# EAGLE board controller-ha-v1 (EAGLE 6.5.0), part 1 of 2
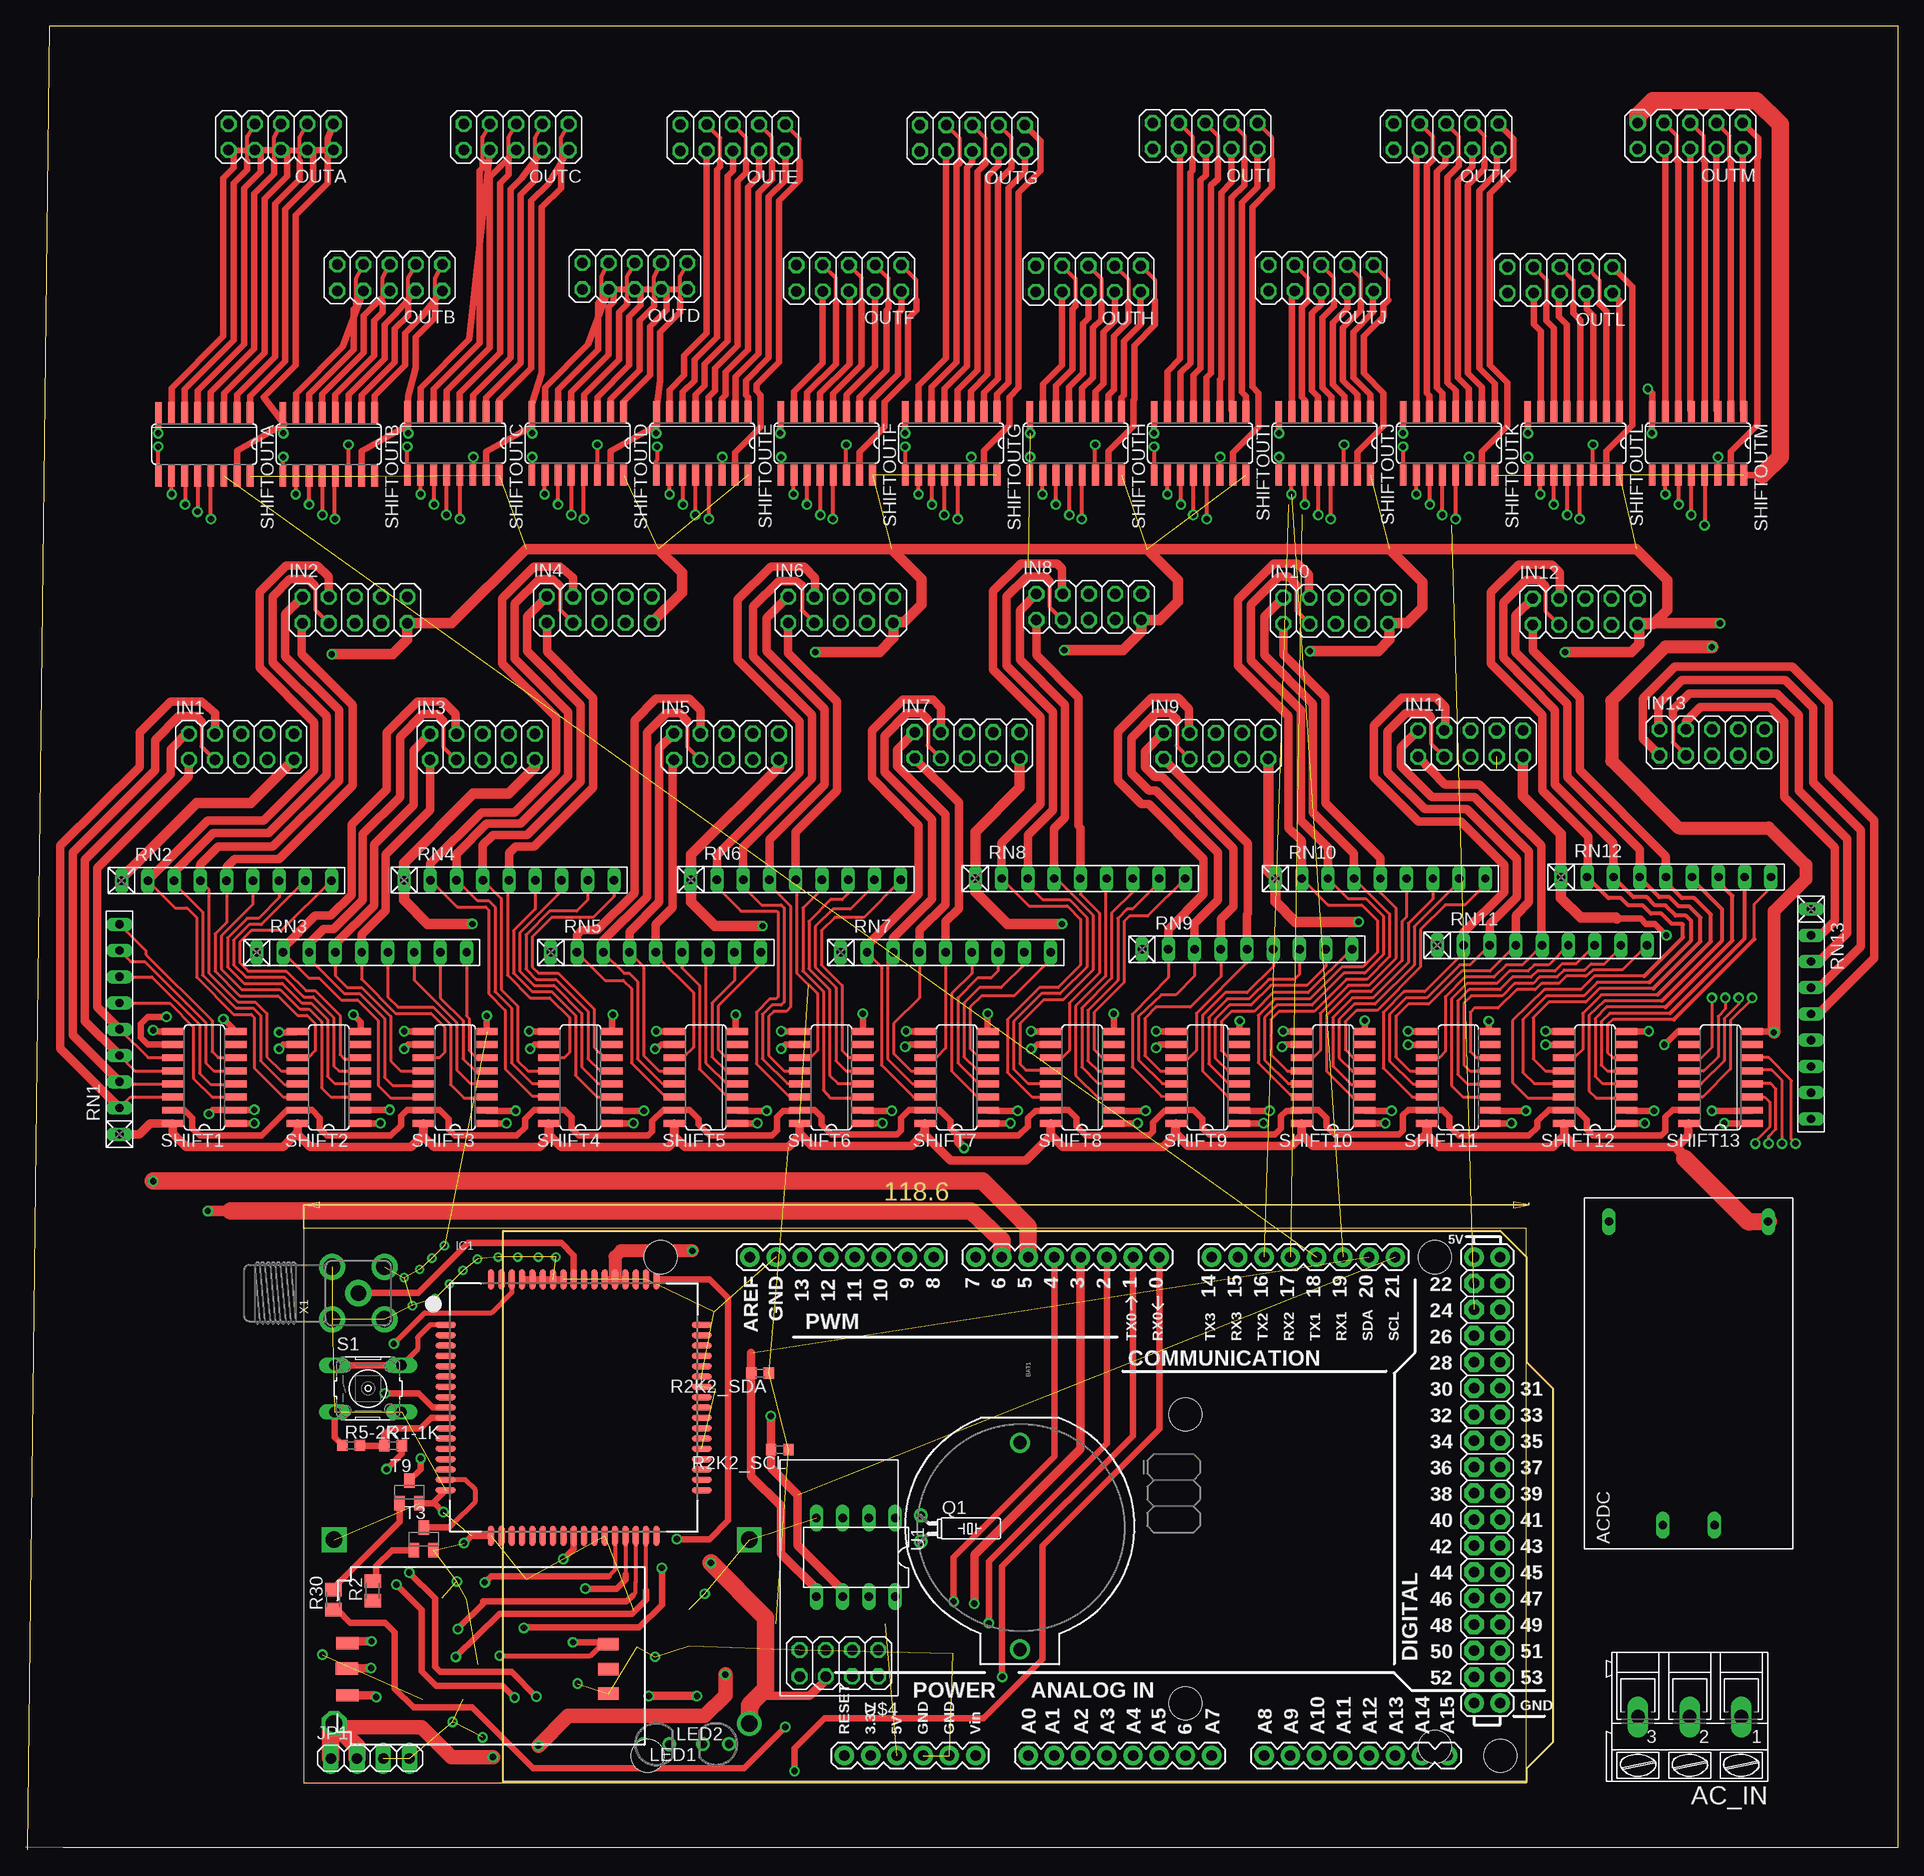
[diagram p0: board, top side]
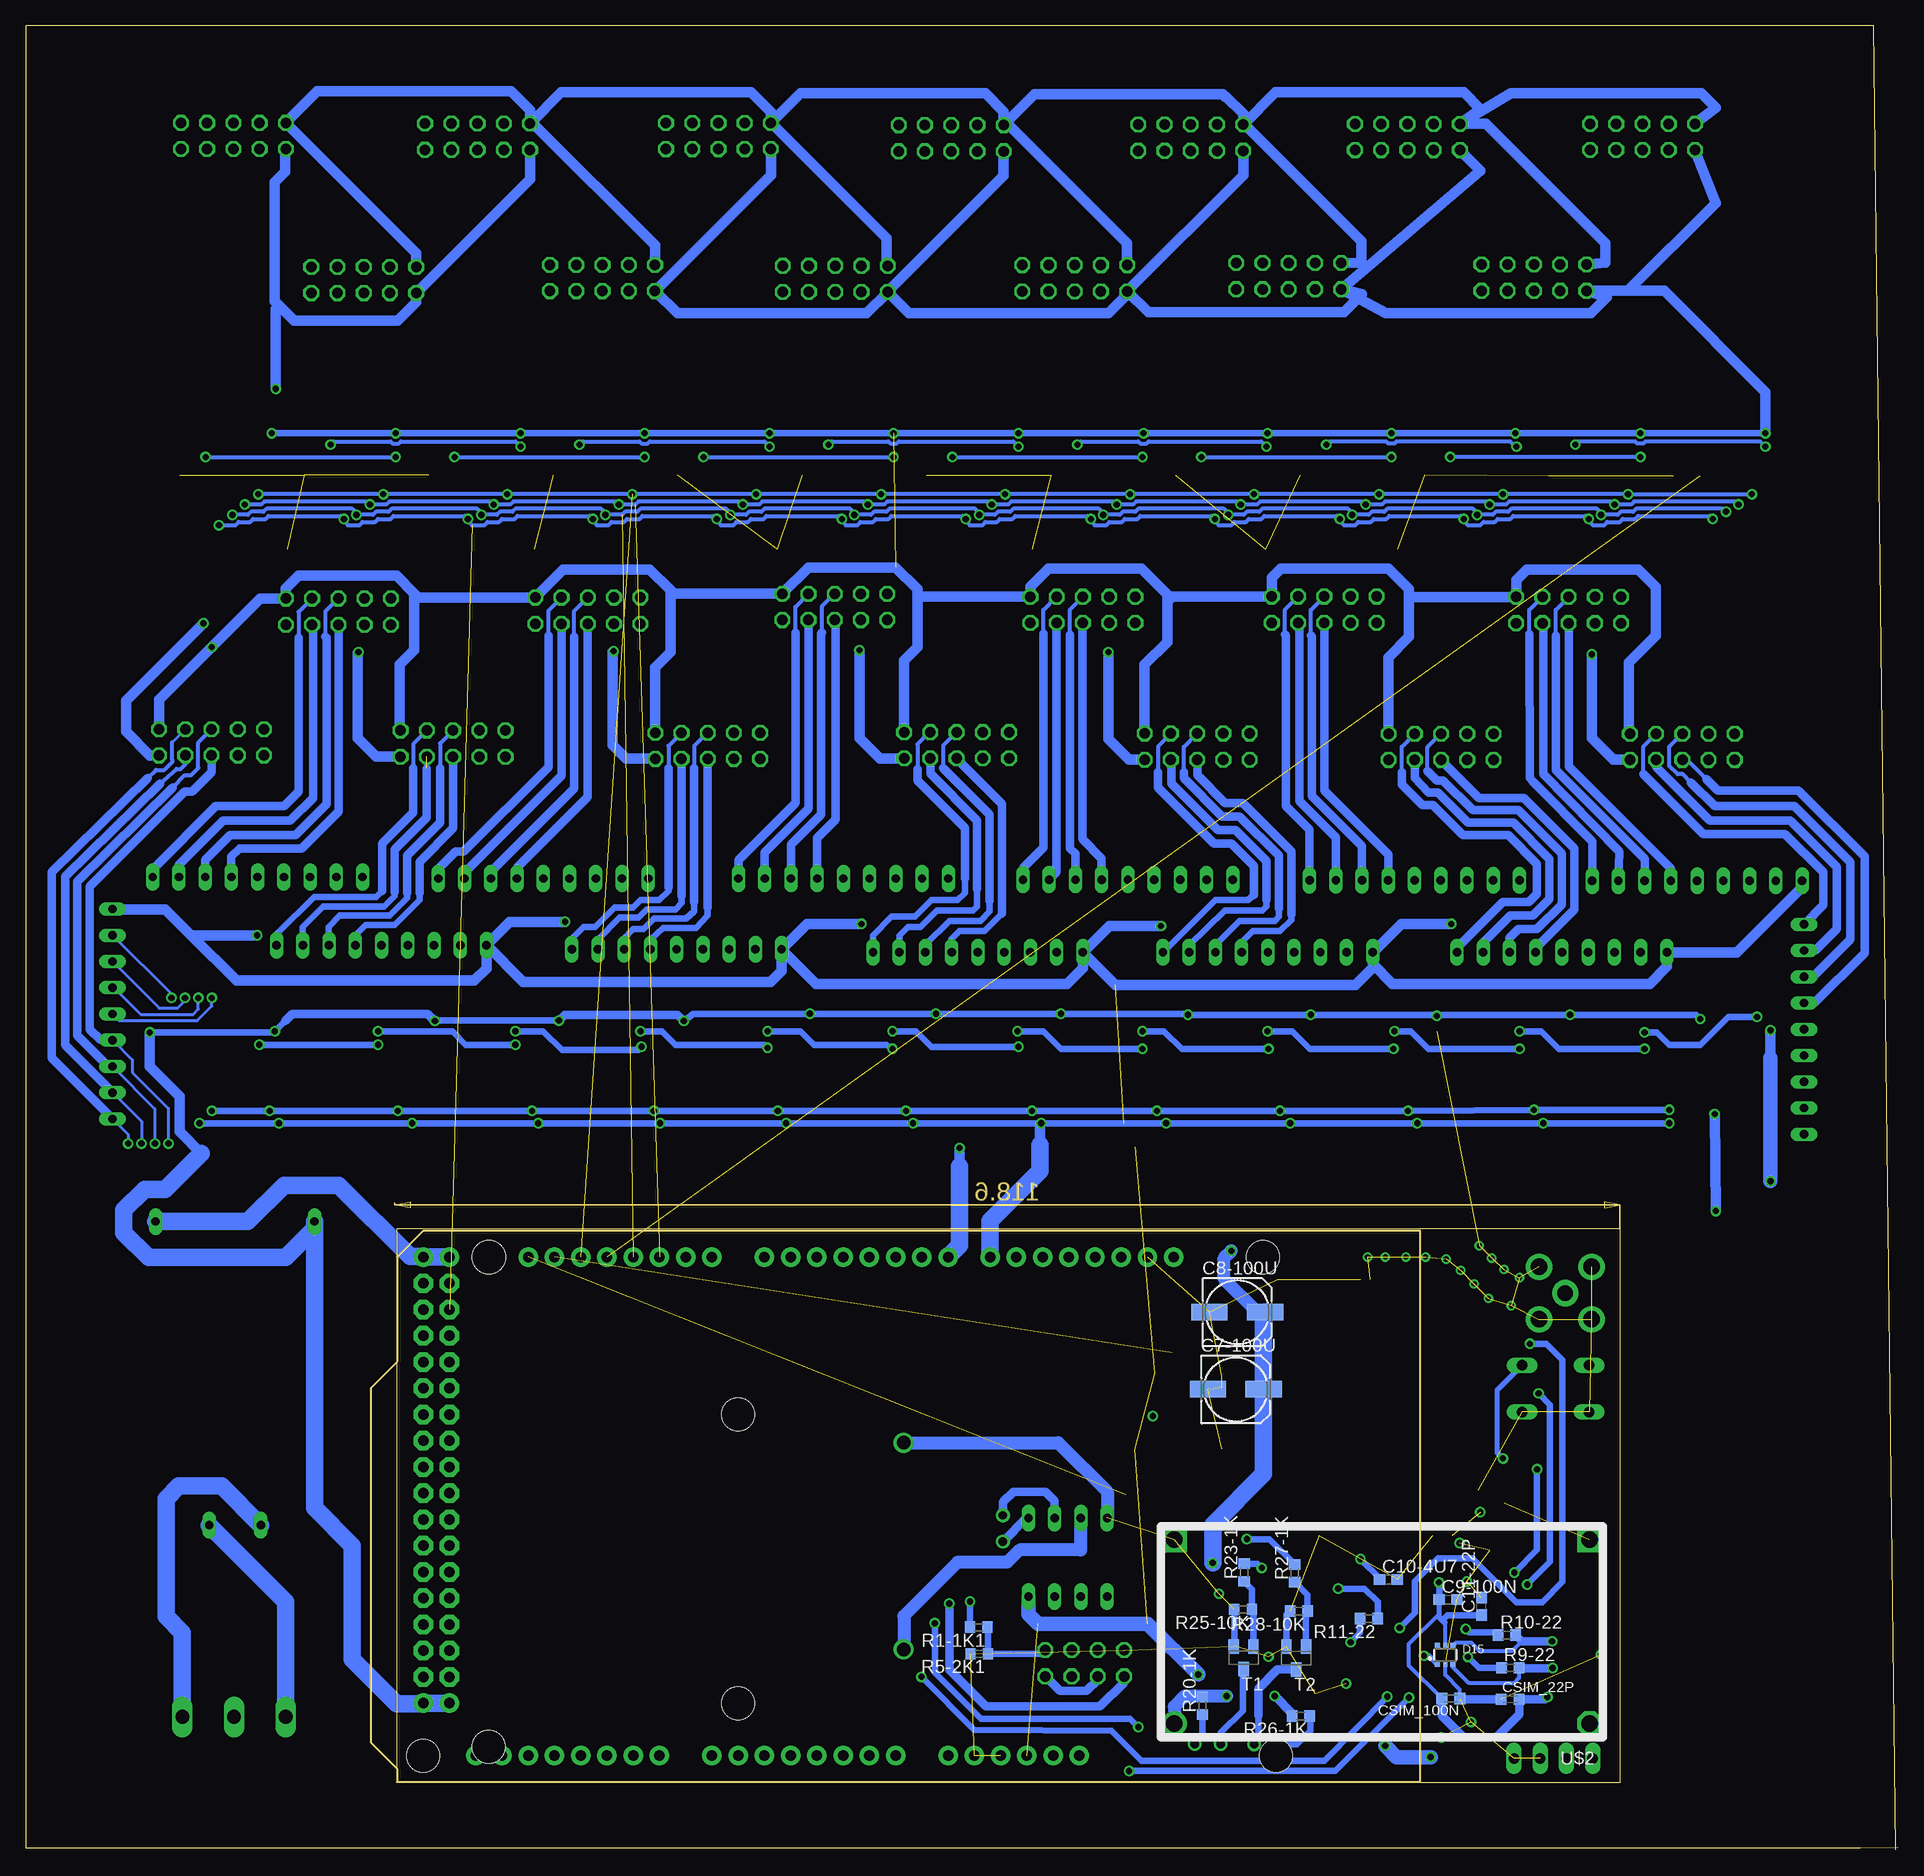
[diagram p1: board, bottom side, seen from below]

Size 181.22 x 176.58 mm. Coordinates in mm from the lower left corner, seen from the top.
Outline: 0.18,0 2.32,176.58 181.22,176.58 181.22,4.48 181.21,4.48 181.21,0.22 3.64,0.22 0,0.23
Outline: 26.92,6.48 145.27,6.49 145.27,60.14 26.92,60.14 26.92,6.48
Copper layers (1*16): Top 0.035mm / dielectric 1.5mm / Bottom 0.035mm
Design rules "default": minimum track width 10mil, minimum drill 24mil, track to track 8mil, track to pad 8mil, pad to pad 8mil, via to via 8mil, smd to smd 8mil, copper to edge 40mil, drill to drill 8mil, minimum pad ring 10mil, minimum via ring 8mil, stop-mask expansion 4mil, vias tented up to drill 0mil, thermal gap 10mil
Net classes: 1 power: width 0.305 mm, drill 0.6 mm, clearance 0.254 mm; 2 gnd: width 0.254 mm, drill 0.6 mm, clearance 0.254 mm
Holes 3.2 mm at 136.42,9.98

## Footprints (pad centres in the part's own frame; a part is rotated, then mirrored left to right if it is on the bottom)
AK3003 = drill 1.321 long: 1 -5.004,0; 2 0,0; 3 5.004,0
HLK-PM01 = drill 0.8 long: AC$1 -14.7,2.5; AC$2 -14.7,-2.5; GND 14.7,7.7; VOUT 14.7,-7.7
BATTCOM_20MM_PTH = drill 1.3: 1 11.85,0; 2 -8.15,0
153CLV-0605 = smd 3.5 x 1.6: + 2.7,0; - -2.7,0
C0603 = smd 1.1 x 1: 1 -0.85,0; 2 0.85,0
C0603K = smd 1.05 x 1.08: 1 -0.875,0; 2 0.875,0
SOT363 = smd 0.5 x 0.5: 1 -0.75,-0.9; 3 0.75,-0.9; 4 0.75,0.9; 6 -0.75,0.9 | smd 0.4 x 0.5: 2 0,-0.9; 5 0,0.9
SIM900_SMT = smd 2 x 0.6: P$1 -12.4,8; P$2 -12.4,7; P$3 -12.4,6; P$4 -12.4,5; P$5 -12.4,4; P$6 -12.4,3; P$7 -12.4,2; P$8 -12.4,1; P$9 -12.4,0; P$10 -12.4,-1; P$11 -12.4,-2; P$12 -12.4,-3; P$13 -12.4,-4; P$14 -12.4,-5; P$15 -12.4,-6; P$16 -12.4,-7; P$17 -12.4,-8; P$35 12.4,-8; P$36 12.4,-7; P$37 12.4,-6; P$38 12.4,-5; P$39 12.4,-4; P$40 12.4,-3; P$41 12.4,-2; P$42 12.4,-1; P$43 12.4,0; P$44 12.4,1; P$45 12.4,2; P$46 12.4,3; P$47 12.4,4; P$48 12.4,5; P$49 12.4,6; P$50 12.4,7; P$51 12.4,8 | smd 0.6 x 2: P$18 -8,-12.4; P$19 -7,-12.4; P$20 -6,-12.4; P$21 -5,-12.4; P$22 -4,-12.4; P$23 -3,-12.4; P$24 -2,-12.4; P$25 -1,-12.4; P$26 0,-12.4; P$27 1,-12.4; P$28 2,-12.4; P$29 3,-12.4; P$30 4,-12.4; P$31 5,-12.4; P$32 6,-12.4; P$33 7,-12.4; P$34 8,-12.4; P$52 8,12.4; P$53 7,12.4; P$54 6,12.4; P$55 5,12.4; P$56 4,12.4; P$57 3,12.4; P$58 2,12.4; P$59 1,12.4; P$60 0,12.4; P$61 -1,12.4; P$62 -2,12.4; P$63 -3,12.4; P$64 -4,12.4; P$65 -5,12.4; P$66 -6,12.4; P$67 -7,12.4; P$68 -8,12.4
2X05 = drill 1.016 octagon: 1 -5.08,-1.27; 2 -5.08,1.27; 3 -2.54,-1.27; 4 -2.54,1.27; 5 0,-1.27; 6 0,1.27; 7 2.54,-1.27; 8 2.54,1.27; 9 5.08,-1.27; 10 5.08,1.27
1X04 = drill 1.016 long: 1 -3.81,0; 2 -1.27,0; 3 1.27,0; 4 3.81,0
LED3MM-NS = drill 0.813: A -1.27,0; K 1.27,0
TC26H = drill 0.813: 1 -1.27,0; 2 1.27,0
R0603 = smd 1 x 1.1: 1 -0.85,0; 2 0.85,0
M0805 = smd 1.3 x 1.6: 1 -0.95,0; 2 0.95,0
RN-9 = drill 0.813 long: 1 -10.16,0; 2 -7.62,0; 3 -5.08,0; 4 -2.54,0; 5 0,0; 6 2.54,0; 7 5.08,0; 8 7.62,0; 9 10.16,0
B3F-10XX = drill 1.016 long: 1 -3.251,2.261; 2 3.251,2.261; 3 -3.251,-2.261; 4 3.251,-2.261
SO16 = smd 0.66 x 2.032: 1 -4.445,-3.073; 2 -3.175,-3.073; 3 -1.905,-3.073; 4 -0.635,-3.073; 5 0.635,-3.073; 6 1.905,-3.073; 7 3.175,-3.073; 8 4.445,-3.073; 9 4.445,3.073; 10 3.175,3.073; 11 1.905,3.073; 12 0.635,3.073; 13 -0.635,3.073; 14 -1.905,3.073; 15 -3.175,3.073; 16 -4.445,3.073
SOT23-BEC = smd 1 x 1.4: B -0.95,-1.1; C 0,1.1; E 0.95,-1.1
DIL08 = drill 0.813 long: 1 -3.81,-3.81; 2 -1.27,-3.81; 3 1.27,-3.81; 4 3.81,-3.81; 5 3.81,3.81; 6 1.27,3.81; 7 -1.27,3.81; 8 -3.81,3.81
ARDUINO_MEGA = drill 1.016 pad 1.88: 0 63.5,50.8; 1 60.96,50.8; 2 58.42,50.8; 3 55.88,50.8; 3.3V 35.56,2.54; 4 53.34,50.8; 5 50.8,50.8; 5V@0 38.1,2.54; 5V@1 93.98,50.8; 5V@2 96.52,50.8; 6 48.26,50.8; 7 45.72,50.8; 8 41.656,50.8; 9 39.116,50.8; 10 36.576,50.8; 11 34.036,50.8; 12 31.496,50.8; 13 28.956,50.8; 14 68.58,50.8; 15 71.12,50.8; 16 73.66,50.8; 17 76.2,50.8; 18 78.74,50.8; 19 81.28,50.8; 20 83.82,50.8; 21 86.36,50.8; A0 50.8,2.54; A1 53.34,2.54; A2 55.88,2.54; A3 58.42,2.54; A4 60.96,2.54; A5 63.5,2.54; A6 66.04,2.54; A7 68.58,2.54; A8 73.66,2.54; A9 76.2,2.54; A10 78.74,2.54; A11 81.28,2.54; A12 83.82,2.54; A13 86.36,2.54; A14 88.9,2.54; A15 91.44,2.54; AREF 23.876,50.8; GND@0 40.64,2.54; GND@1 43.18,2.54; GND@2 93.98,7.62; GND@3 96.52,7.62; GND@4 26.416,50.8; RESET 33.02,2.54; VIN 45.72,2.54 | drill 1.016 pad 1.88 octagon: 22 93.98,48.26; 23 96.52,48.26; 24 93.98,45.72; 25 96.52,45.72; 26 93.98,43.18; 27 96.52,43.18; 28 93.98,40.64; 29 96.52,40.64; 30 93.98,38.1; 31 96.52,38.1; 32 93.98,35.56; 33 96.52,35.56; 34 93.98,33.02; 35 96.52,33.02; 36 93.98,30.48; 37 96.52,30.48; 38 93.98,27.94; 39 96.52,27.94; 40 93.98,25.4; 41 96.52,25.4; 42 93.98,22.86; 43 96.52,22.86; 44 93.98,20.32; 45 96.52,20.32; 46 93.98,17.78; 47 96.52,17.78; 48 93.98,15.24; 49 96.52,15.24; 50 93.98,12.7; 51 96.52,12.7; 52 93.98,10.16; 53 96.52,10.16 | hole 3.2: 15.24,50.8; 13.97,2.54; 66.04,35.56; 66.04,7.62; 90.17,50.8; 96.52,2.54
DCDCMODULE = drill 1.6 square: GND#0 1.7,1.7; GND#1 41.9,1.7 | drill 1.6 octagon: VIN 1.7,19.5 | drill 1.6: VOUT 41.9,19.5
ESP8266 = drill 1.016 octagon: CHPD 1.27,1.27; GND 3.81,-1.27; IO0 -1.27,-1.27; IO2 1.27,-1.27; RST -1.27,1.27; RXD -3.81,-1.27; TXD 3.81,1.27; VCC -3.81,1.27
SIMHOLDER3 = smd 2.2 x 1.2: 1 0.95,4.81; 2 0.91,7.41; 3 0.95,9.86 | smd 2 x 1.2: 4 26.2,9.78; 5 26.22,7.34; 6 26.22,4.98
SMA90_DIP = drill 1.5 pad 2.54: ANTENNA 0,0 | drill 1.6 pad 2.54: GND1 -2.54,2.54; GND2 2.54,2.54; GND3 -2.54,-2.54; GND4 2.54,-2.54

## Placement (x,y rotation side)
AC_IN  AK3003  [AK3003]  161.07,12.88 180 top
ACDC  HLK-PM01  [HLK-PM01]  160.97,46.13 90 top
BAT1  [BATTCOM_20MM_PTH]  96.24,31.26 270 top
C7-100U  [153CLV-0605]  64.09,44.58 0 bottom
C8-100U  [153CLV-0605]  63.95,52.06 0 bottom
C9-100N  [C0603]  43.54,24.23 0 bottom
C10-4U7  [C0603]  49.3,26.18 0 bottom
C11-22P  [C0603]  40.3,23.57 90 bottom
CSIM_22P  [C0603K]  37.53,14.58 0 bottom
CSIM_100N  [C0603K]  43.27,14.65 180 bottom
D15  [SOT363]  43.81,18.87 0 bottom
IC1  [SIM900_SMT]  53.04,42.82 0 top
IN1  [2X05]  20.86,106.78 0 top
IN2  [2X05]  31.86,120.03 0 top
IN3  [2X05]  44.21,106.78 0 top
IN4  [2X05]  55.52,120.06 0 top
IN5  [2X05]  67.83,106.8 0 top
IN6  [2X05]  78.89,120.05 0 top
IN7  [2X05]  91.12,106.93 0 top
IN8  [2X05]  102.91,120.33 0 top
IN9  [2X05]  115.21,106.88 0 top
IN10  [2X05]  126.82,119.96 0 top
IN11  [2X05]  139.86,107.09 0 top
IN12  [2X05]  150.97,119.87 0 top
IN13  [2X05]  163.24,107.21 0 top
JP1  [1X04]  33.34,8.86 0 top
LED1  [LED3MM-NS]  66.81,10.24 180 top
LED2  [LED3MM-NS]  61.04,10.22 0 top
OUTA  [2X05]  24.71,165.83 180 top
OUTB  [2X05]  35.23,152.2 180 top
OUTC  [2X05]  47.47,165.82 180 top
OUTD  [2X05]  58.96,152.35 180 top
OUTE  [2X05]  68.45,165.76 180 top
OUTF  [2X05]  79.68,152.15 180 top
OUTG  [2X05]  91.64,165.7 180 top
OUTH  [2X05]  102.87,152.09 180 top
OUTI  [2X05]  114.17,165.91 180 top
OUTJ  [2X05]  125.39,152.17 180 top
OUTK  [2X05]  137.49,165.85 180 top
OUTL  [2X05]  148.51,151.97 180 top
OUTM  [2X05]  161.13,165.92 180 top
Q1  [TC26H]  86.63,31.11 270 top
R1-1K  [R0603]  35.55,39.12 0 top
R1-1K1  [R0603]  88.97,21.55 180 bottom
R2  R120  [M0805]  33.58,25.08 90 top
R2K2_SCL  [R0603]  72.99,38.75 180 top
R2K2_SDA  [R0603]  71.08,46.15 180 top
R5-2K  [R0603]  31.5,39.16 0 top
R5-2K1  [R0603]  88.92,18.98 0 bottom
R9-22  [R0603]  37.51,17.63 0 bottom
R10-22  [R0603]  37.85,20.78 0 bottom
R11-22  [R0603]  51.2,22.4 180 bottom
R20-1K  [R0603]  67.31,13.94 90 bottom
R23-1K  [R0603]  63.29,26.85 90 bottom
R25-10K  [R0603]  63.38,23.28 180 bottom
R26-1K  [R0603]  57.79,12.97 180 bottom
R27-1K  [R0603]  58.38,26.78 90 bottom
R28-10K  [R0603]  57.98,23.12 180 bottom
R30  R120  [M0805]  29.77,24.23 90 top
RN1  [RN-9]  9.07,79.44 90 top
RN2  [RN-9]  19.43,93.83 0 top
RN3  [RN-9]  32.51,86.88 0 top
RN4  [RN-9]  46.78,93.88 0 top
RN5  [RN-9]  60.98,86.88 0 top
RN6  [RN-9]  74.53,93.93 0 top
RN7  [RN-9]  89.05,86.88 0 top
RN8  [RN-9]  102.08,94.03 0 top
RN9  [RN-9]  118.22,87.18 0 top
RN10  [RN-9]  131.13,94.03 0 top
RN11  [RN-9]  146.79,87.58 0 top
RN12  [RN-9]  158.78,94.18 0 top
RN13  [RN-9]  172.82,80.92 270 top
S1  [B3F-10XX]  33.13,44.66 0 top
SHIFT1  74HC165D  [SO16]  17.28,74.78 90 top
SHIFT2  74HC165D  [SO16]  29.33,74.78 90 top
SHIFT3  74HC165D  [SO16]  41.56,74.78 90 top
SHIFT4  74HC165D  [SO16]  53.7,74.78 90 top
SHIFT5  74HC165D  [SO16]  65.84,74.78 90 top
SHIFT6  74HC165D  [SO16]  77.98,74.78 90 top
SHIFT7  74HC165D  [SO16]  90.12,74.78 90 top
SHIFT8  74HC165D  [SO16]  102.26,74.78 90 top
SHIFT9  74HC165D  [SO16]  114.4,74.78 90 top
SHIFT10  74HC165D  [SO16]  126.54,74.78 90 top
SHIFT11  74HC165D  [SO16]  138.68,74.78 90 top
SHIFT12  74HC165D  [SO16]  151.92,74.78 90 top
SHIFT13  74HC165D  [SO16]  164.06,74.78 90 top
SHIFTOUTA  74HC595D  [SO16]  17.28,136.08 180 top
SHIFTOUTB  74HC595D  [SO16]  29.33,136.08 180 top
SHIFTOUTC  74HC595D  [SO16]  41.38,136.18 180 top
SHIFTOUTD  74HC595D  [SO16]  53.43,136.18 180 top
SHIFTOUTE  74HC595D  [SO16]  65.48,136.18 180 top
SHIFTOUTF  74HC595D  [SO16]  77.53,136.18 180 top
SHIFTOUTG  74HC595D  [SO16]  89.58,136.18 180 top
SHIFTOUTH  74HC595D  [SO16]  101.63,136.18 180 top
SHIFTOUTI  74HC595D  [SO16]  113.68,136.18 180 top
SHIFTOUTJ  74HC595D  [SO16]  125.73,136.18 180 top
SHIFTOUTK  74HC595D  [SO16]  137.78,136.18 180 top
SHIFTOUTL  74HC595D  [SO16]  149.83,136.18 180 top
SHIFTOUTM  74HC595D  [SO16]  161.88,136.18 180 top
T1  [SOT23-BEC]  63.33,18.6 180 bottom
T2  [SOT23-BEC]  58.23,18.56 180 bottom
T3  [SOT23-BEC]  38.52,30.1 0 top
T9  [SOT23-BEC]  37.12,34.65 0 top
U1  DS1307  [DIL08]  80.35,28.32 180 top
U3  ARDUINO-MEGAFULL  [ARDUINO_MEGA]  46.22,6.58 0 top
U$2  DCDCMODULE  [DCDCMODULE]  28.14,31.72 180 bottom
U$4  ESP8266  [ESP8266]  78.72,18.07 180 top
U$5  SIMHOLDER3  [SIMHOLDER3]  30.18,10.15 0 top
X1  [SMA90_DIP]  32.19,53.9 90 top

## Library data of the parts
AC_IN = con-ptr500
ACDC U$2 = bontor
BAT1 = SparkFun-Electromechanical
C7-100U C8-100U C9-100N C10-4U7 C11-22P CSIM_22P CSIM_100N R1-1K R1-1K1 R2K2_SCL R2K2_SDA R5-2K R5-2K1 R9-22 R10-22 R11-22 R20-1K R23-1K R25-10K R26-1K R27-1K R28-10K = rcl
D15 IC1 X1 = microbuilder
IN1-IN13 JP1 OUTA OUTB OUTC OUTD OUTE OUTF OUTG OUTH OUTI OUTJ OUTK OUTL OUTM = pinhead
LED1 LED2 = SparkFun-LED
Q1 = crystal; OC_FARNELL: unknown; OC_NEWARK: unknown
R2 R30 = resistor
RN1-RN13 = resistor-net; OC_FARNELL: unknown; OC_NEWARK: unknown
S1 = switch-omron; MPN: B3F-1000; OC_FARNELL: 176432; OC_NEWARK: 36M3542
SHIFT1-SHIFT13 SHIFTOUTA SHIFTOUTB SHIFTOUTC SHIFTOUTD SHIFTOUTE SHIFTOUTF SHIFTOUTG SHIFTOUTH SHIFTOUTI SHIFTOUTJ SHIFTOUTK SHIFTOUTL SHIFTOUTM = 74xx-eu
T1 T2 = transistor
T3 T9 = transistor-neu-to92
U1 = adafruit
U3 = SparkFun-Boards
U$4 = tigorcustom
U$5 = SparkFun

## Nets
1-1: IN1.1 RN1.5 SHIFT1.11
1-2: IN1.2 RN1.4 SHIFT1.12
1-3: IN1.3 RN1.3 SHIFT1.13
1-4: IN1.4 RN1.2 SHIFT1.14
1-5: IN1.5 RN1.6 SHIFT1.3
1-6: IN1.6 RN1.7 SHIFT1.4
1-7: IN1.7 RN1.8 SHIFT1.5
1-8: IN1.8 RN1.9 SHIFT1.6
2-1: IN2.1 RN2.5 SHIFT2.11
2-2: IN2.2 RN2.4 SHIFT2.12
2-3: IN2.3 RN2.3 SHIFT2.13
2-4: IN2.4 RN2.2 SHIFT2.14
2-5: IN2.5 RN2.6 SHIFT2.3
2-6: IN2.6 RN2.7 SHIFT2.4
2-7: IN2.7 RN2.8 SHIFT2.5
2-8: IN2.8 RN2.9 SHIFT2.6
3-1: IN3.1 RN3.5 SHIFT3.11
3-2: IN3.2 RN3.4 SHIFT3.12
3-3: IN3.3 RN3.3 SHIFT3.13
3-4: IN3.4 RN3.2 SHIFT3.14
3-5: IN3.5 RN3.6 SHIFT3.3
3-6: IN3.6 RN3.7 SHIFT3.4
3-7: IN3.7 RN3.8 SHIFT3.5
3-8: IN3.8 RN3.9 SHIFT3.6
4-1: IN4.1 RN4.5 SHIFT4.11
4-2: IN4.2 RN4.4 SHIFT4.12
4-3: IN4.3 RN4.3 SHIFT4.13
4-4: IN4.4 RN4.2 SHIFT4.14
4-5: IN4.5 RN4.6 SHIFT4.3
4-6: IN4.6 RN4.7 SHIFT4.4
4-7: IN4.7 RN4.8 SHIFT4.5
4-8: IN4.8 RN4.9 SHIFT4.6
5-1: IN5.1 RN5.5 SHIFT5.11
5-2: IN5.2 RN5.4 SHIFT5.12
5-3: IN5.3 RN5.3 SHIFT5.13
5-4: IN5.4 RN5.2 SHIFT5.14
5-5: IN5.5 RN5.6 SHIFT5.3
5-6: IN5.6 RN5.7 SHIFT5.4
5-7: IN5.7 RN5.8 SHIFT5.5
5-8: IN5.8 RN5.9 SHIFT5.6
6-1: IN6.1 RN6.5 SHIFT6.11
6-2: IN6.2 RN6.4 SHIFT6.12
6-3: IN6.3 RN6.3 SHIFT6.13
6-4: IN6.4 RN6.2 SHIFT6.14
6-5: IN6.5 RN6.6 SHIFT6.3
6-6: IN6.6 RN6.7 SHIFT6.4
6-7: IN6.7 RN6.8 SHIFT6.5
6-8: IN6.8 RN6.9 SHIFT6.6
7-1: IN7.1 RN7.5 SHIFT7.11
7-2: IN7.2 RN7.4 SHIFT7.12
7-3: IN7.3 RN7.3 SHIFT7.13
7-4: IN7.4 RN7.2 SHIFT7.14
7-5: IN7.5 RN7.6 SHIFT7.3
7-6: IN7.6 RN7.7 SHIFT7.4
7-7: IN7.7 RN7.8 SHIFT7.5
7-8: IN7.8 RN7.9 SHIFT7.6
8-1: IN8.1 RN8.5 SHIFT8.11
8-2: IN8.2 RN8.4 SHIFT8.12
8-3: IN8.3 RN8.3 SHIFT8.13
8-4: IN8.4 RN8.2 SHIFT8.14
8-5: IN8.5 RN8.6 SHIFT8.3
8-6: IN8.6 RN8.7 SHIFT8.4
8-7: IN8.7 RN8.8 SHIFT8.5
8-8: IN8.8 RN8.9 SHIFT8.6
9-1: IN9.1 RN9.5 SHIFT9.11
9-2: IN9.2 RN9.4 SHIFT9.12
9-3: IN9.3 RN9.3 SHIFT9.13
9-4: IN9.4 RN9.2 SHIFT9.14
9-5: IN9.5 RN9.6 SHIFT9.3
9-6: IN9.6 RN9.7 SHIFT9.4
9-7: IN9.7 RN9.8 SHIFT9.5
9-8: IN9.8 RN9.9 SHIFT9.6
10-1: IN10.1 RN10.5 SHIFT10.11
10-2: IN10.2 RN10.4 SHIFT10.12
10-3: IN10.3 RN10.3 SHIFT10.13
10-4: IN10.4 RN10.2 SHIFT10.14
10-5: IN10.5 RN10.6 SHIFT10.3
10-6: IN10.6 RN10.7 SHIFT10.4
10-7: IN10.7 RN10.8 SHIFT10.5
10-8: IN10.8 RN10.9 SHIFT10.6
11-1: IN11.1 RN11.5 SHIFT11.11
11-2: IN11.2 RN11.4 SHIFT11.12
11-3: IN11.3 RN11.3 SHIFT11.13
11-4: IN11.4 RN11.2 SHIFT11.14
11-5: IN11.5 RN11.6 SHIFT11.3
11-6: IN11.6 RN11.7 SHIFT11.4
11-7: IN11.7 RN11.8 SHIFT11.5
11-8: IN11.8 RN11.9 SHIFT11.6
12-1: IN12.1 RN12.5 SHIFT12.11
12-2: IN12.2 RN12.4 SHIFT12.12
12-3: IN12.3 RN12.3 SHIFT12.13
12-4: IN12.4 RN12.2 SHIFT12.14
12-5: IN12.5 RN12.6 SHIFT12.3
12-6: IN12.6 RN12.7 SHIFT12.4
12-7: IN12.7 RN12.8 SHIFT12.5
12-8: IN12.8 RN12.9 SHIFT12.6
13-1: IN13.1 RN13.5 SHIFT13.11
13-2: IN13.2 RN13.4 SHIFT13.12
13-3: IN13.3 RN13.3 SHIFT13.13
13-4: IN13.4 RN13.2 SHIFT13.14
13-5: IN13.5 RN13.6 SHIFT13.3
13-6: IN13.6 RN13.7 SHIFT13.4
13-7: IN13.7 RN13.8 SHIFT13.5
13-8: IN13.8 RN13.9 SHIFT13.6
+3V3: C7-100U.+ C8-100U.+ IC1.P$55 IC1.P$56 IC1.P$57 R20-1K.2 R26-1K.2 U$2.VOUT U$4.CHPD U$4.VCC
A-1: OUTA.1 SHIFTOUTA.15
A-2: OUTA.2 SHIFTOUTA.1
A-3: OUTA.3 SHIFTOUTA.2
A-4: OUTA.4 SHIFTOUTA.3
A-5: OUTA.5 SHIFTOUTA.4
A-6: OUTA.6 SHIFTOUTA.5
A-7: OUTA.7 SHIFTOUTA.6
A-8: OUTA.8 SHIFTOUTA.7
B-1: OUTB.1 SHIFTOUTB.15
B-2: OUTB.2 SHIFTOUTB.1
B-3: OUTB.3 SHIFTOUTB.2
B-4: OUTB.4 SHIFTOUTB.3
B-5: OUTB.5 SHIFTOUTB.4
B-6: OUTB.6 SHIFTOUTB.5
B-7: OUTB.7 SHIFTOUTB.6
B-8: OUTB.8 SHIFTOUTB.7
C-1: OUTC.1 SHIFTOUTC.15
C-2: OUTC.2 SHIFTOUTC.1
C-3: OUTC.3 SHIFTOUTC.2
C-4: OUTC.4 SHIFTOUTC.3
C-5: OUTC.5 SHIFTOUTC.4
C-6: OUTC.6 SHIFTOUTC.5
C-7: OUTC.7 SHIFTOUTC.6
C-8: OUTC.8 SHIFTOUTC.7
CE: SHIFT1.15 SHIFT2.15 SHIFT3.15 SHIFT4.15 SHIFT5.15 SHIFT6.15 SHIFT7.15 SHIFT8.15 SHIFT9.15 SHIFT10.15 SHIFT11.15 SHIFT12.15 SHIFT13.15 U3.7
CLK: SHIFT1.2 SHIFT2.2 SHIFT3.2 SHIFT4.2 SHIFT5.2 SHIFT6.2 SHIFT7.2 SHIFT8.2 SHIFT9.2 SHIFT10.2 SHIFT11.2 SHIFT12.2 SHIFT13.2 U3.6
D-1: OUTD.1 SHIFTOUTD.15
D-2: OUTD.2 SHIFTOUTD.1
D-3: OUTD.3 SHIFTOUTD.2
D-4: OUTD.4 SHIFTOUTD.3
D-5: OUTD.5 SHIFTOUTD.4
D-6: OUTD.6 SHIFTOUTD.5
D-7: OUTD.7 SHIFTOUTD.6
D-8: OUTD.8 SHIFTOUTD.7
DBG_RX: U3.15
DBG_TX: U3.14
DS_OE: SHIFTOUTA.13 SHIFTOUTB.13 SHIFTOUTC.13 SHIFTOUTD.13 SHIFTOUTE.13 SHIFTOUTF.13 SHIFTOUTG.13 SHIFTOUTH.13 SHIFTOUTI.13 SHIFTOUTJ.13 SHIFTOUTK.13 SHIFTOUTL.13 SHIFTOUTM.13 U3.24
E-1: OUTE.1 SHIFTOUTE.15
E-2: OUTE.2 SHIFTOUTE.1
E-3: OUTE.3 SHIFTOUTE.2
E-4: OUTE.4 SHIFTOUTE.3
E-5: OUTE.5 SHIFTOUTE.4
E-6: OUTE.6 SHIFTOUTE.5
E-7: OUTE.7 SHIFTOUTE.6
E-8: OUTE.8 SHIFTOUTE.7
ESP_RX: R1-1K1.1 R5-2K1.2 U$4.RXD
ESP_TX: U3.3 U$4.TXD
F-1: OUTF.1 SHIFTOUTF.15
F-2: OUTF.2 SHIFTOUTF.1
F-3: OUTF.3 SHIFTOUTF.2
F-4: OUTF.4 SHIFTOUTF.3
F-5: OUTF.5 SHIFTOUTF.4
F-6: OUTF.6 SHIFTOUTF.5
F-7: OUTF.7 SHIFTOUTF.6
F-8: OUTF.8 SHIFTOUTF.7
G-1: OUTG.1 SHIFTOUTG.15
G-2: OUTG.2 SHIFTOUTG.1
G-3: OUTG.3 SHIFTOUTG.2
G-4: OUTG.4 SHIFTOUTG.3
G-5: OUTG.5 SHIFTOUTG.4
G-6: OUTG.6 SHIFTOUTG.5
G-7: OUTG.7 SHIFTOUTG.6
G-8: OUTG.8 SHIFTOUTG.7
GND: ACDC.GND BAT1.2 C7-100U.- C8-100U.- C9-100N.2 C10-4U7.2 C11-22P.2 CSIM_22P.1 CSIM_100N.1 D15.2 IC1.P$17 IC1.P$18 IC1.P$29 IC1.P$39 IC1.P$45 IC1.P$46 IC1.P$53 IC1.P$54 IC1.P$58 IC1.P$59 IC1.P$61 IC1.P$62 IC1.P$63 IC1.P$64 IC1.P$65 IN1.10 IN2.10 IN3.10 IN4.10 IN5.10 IN6.10 IN7.10 IN8.10 IN9.10 IN10.10 IN11.10 IN12.10 IN13.10 JP1.3 JP1.4 OUTA.10 OUTB.10 OUTC.10 OUTD.10 OUTE.10 OUTF.10 OUTG.10 OUTH.10 OUTI.10 OUTJ.10 OUTK.10 OUTL.10 OUTM.10 R5-2K1.1 R5-2K.1 R25-10K.2 R28-10K.2 S1.3 S1.4 SHIFT1.8 SHIFT2.8 SHIFT3.8 SHIFT4.8 SHIFT5.8 SHIFT6.8 SHIFT7.8 SHIFT8.8 SHIFT9.8 SHIFT10.8 SHIFT11.8 SHIFT12.8 SHIFT13.8 SHIFTOUTA.8 SHIFTOUTB.8 SHIFTOUTC.8 SHIFTOUTD.8 SHIFTOUTE.8 SHIFTOUTF.8 SHIFTOUTG.8 SHIFTOUTH.8 SHIFTOUTI.8 SHIFTOUTJ.8 SHIFTOUTK.8 SHIFTOUTL.8 SHIFTOUTM.8 T1.E T2.E T3.E T9.E U1.4 U3.GND@0 U3.GND@1 U3.GND@2 U3.GND@3 U3.GND@4 U$2.GND#0 U$2.GND#1 U$4.GND U$5.6 X1.GND1 X1.GND2 X1.GND3 X1.GND4
GPIO11: IC1.P$67
GPIO12: IC1.P$68
H-1: OUTH.1 SHIFTOUTH.15
H-2: OUTH.2 SHIFTOUTH.1
H-3: OUTH.3 SHIFTOUTH.2
H-4: OUTH.4 SHIFTOUTH.3
H-5: OUTH.5 SHIFTOUTH.4
H-6: OUTH.6 SHIFTOUTH.5
H-7: OUTH.7 SHIFTOUTH.6
H-8: OUTH.8 SHIFTOUTH.7
I-1: OUTI.1 SHIFTOUTI.15
I-2: OUTI.2 SHIFTOUTI.1
I-3: OUTI.3 SHIFTOUTI.2
I-4: OUTI.4 SHIFTOUTI.3
I-5: OUTI.5 SHIFTOUTI.4
I-6: OUTI.6 SHIFTOUTI.5
I-7: OUTI.7 SHIFTOUTI.6
I-8: OUTI.8 SHIFTOUTI.7
J-1: OUTJ.1 SHIFTOUTJ.15
J-2: OUTJ.2 SHIFTOUTJ.1
J-3: OUTJ.3 SHIFTOUTJ.2
J-4: OUTJ.4 SHIFTOUTJ.3
J-5: OUTJ.5 SHIFTOUTJ.4
J-6: OUTJ.6 SHIFTOUTJ.5
J-7: OUTJ.7 SHIFTOUTJ.6
J-8: OUTJ.8 SHIFTOUTJ.7
K-1: OUTK.1 SHIFTOUTK.15
K-2: OUTK.2 SHIFTOUTK.1
K-3: OUTK.3 SHIFTOUTK.2
K-4: OUTK.4 SHIFTOUTK.3
K-5: OUTK.5 SHIFTOUTK.4
K-6: OUTK.6 SHIFTOUTK.5
K-7: OUTK.7 SHIFTOUTK.6
K-8: OUTK.8 SHIFTOUTK.7
L-1: OUTL.1 SHIFTOUTL.15
L-2: OUTL.2 SHIFTOUTL.1
L-3: OUTL.3 SHIFTOUTL.2
L-4: OUTL.4 SHIFTOUTL.3
L-5: OUTL.5 SHIFTOUTL.4
L-6: OUTL.6 SHIFTOUTL.5
L-7: OUTL.7 SHIFTOUTL.6
L-8: OUTL.8 SHIFTOUTL.7
M-1: OUTM.1 SHIFTOUTM.15
M-2: OUTM.2 SHIFTOUTM.1
M-3: OUTM.3 SHIFTOUTM.2
M-4: OUTM.4 SHIFTOUTM.3
M-5: OUTM.5 SHIFTOUTM.4
M-6: OUTM.6 SHIFTOUTM.5
M-7: OUTM.7 SHIFTOUTM.6
M-8: OUTM.8 SHIFTOUTM.7
N$1: R1-1K.2 U3.1
N$2: IC1.P$31 R11-22.1
N$3: IC1.P$32 R10-22.1
N$4: IC1.P$33 R9-22.1
N$5: C10-4U7.1 IC1.P$26
N$6: IC1.P$60 X1.ANTENNA
N$7: AC_IN.1 ACDC.AC$1
N$8: LED1.A R20-1K.1
N$9: LED1.K T1.C
N$10: R23-1K.1 R25-10K.1 T1.B
N$11: LED2.A R26-1K.1
N$12: LED2.K T2.C
N$13: R27-1K.1 R28-10K.1 T2.B
N$14: R30.2 T9.B
N$15: R2.2 T3.B
N$16: Q1.1 U1.2
N$17: AC_IN.3 ACDC.AC$2
N$18: SHIFT2.10 SHIFT3.9
N$19: Q1.2 U1.1
N$20: R1-1K1.2 U3.4
N$21: SHIFT3.10 SHIFT4.9
N$22: SHIFT4.10 SHIFT5.9
N$23: BAT1.1 U1.3
N$24: SHIFT5.10 SHIFT6.9
N$25: SHIFT7.10 SHIFT8.9
N$26: SHIFTOUTA.9 SHIFTOUTB.14
N$27: SHIFT8.10 SHIFT9.9
N$28: SHIFT12.10 SHIFT13.9
N$29: SHIFT11.10 SHIFT12.9
N$30: SHIFT10.10 SHIFT11.9
N$31: SHIFTOUTC.9 SHIFTOUTD.14
N$32: SHIFTOUTE.9 SHIFTOUTF.14
N$33: SHIFTOUTG.9 SHIFTOUTH.14
N$34: SHIFTOUTI.9 SHIFTOUTJ.14
N$35: SHIFTOUTK.9 SHIFTOUTL.14
N$36: SHIFT6.10 SHIFT7.9
N$37: SHIFTOUTB.9 SHIFTOUTC.14
N$38: SHIFTOUTD.9 SHIFTOUTE.14
N$39: SHIFTOUTF.9 SHIFTOUTG.14
N$40: SHIFTOUTH.9 SHIFTOUTI.14
N$41: SHIFTOUTJ.9 SHIFTOUTK.14
N$42: SHIFTOUTL.9 SHIFTOUTM.14
N$50: SHIFT1.10 SHIFT2.9
N$121: SHIFT9.10 SHIFT10.9
PL: SHIFT1.1 SHIFT2.1 SHIFT3.1 SHIFT4.1 SHIFT5.1 SHIFT6.1 SHIFT7.1 SHIFT8.1 SHIFT9.1 SHIFT10.1 SHIFT11.1 SHIFT12.1 SHIFT13.1 U3.8
PWRKEY: R30.1 U3.2
Q7: SHIFT1.9 U3.5
RESET: R2.1
SCL: R2K2_SCL.2 U1.6 U3.21
SDA: R2K2_SDA.2 U1.5 U3.20
SHCP: SHIFTOUTA.11 SHIFTOUTB.11 SHIFTOUTC.11 SHIFTOUTD.11 SHIFTOUTE.11 SHIFTOUTF.11 SHIFTOUTG.11 SHIFTOUTH.11 SHIFTOUTI.11 SHIFTOUTJ.11 SHIFTOUTK.11 SHIFTOUTL.11 SHIFTOUTM.11 U3.16
SIM_NETLIGHT: IC1.P$52 R27-1K.2
SIM_PWRKEY: IC1.P$1 S1.1 S1.2 T9.C
SIM_RESET: IC1.P$16 T3.C
SIM_RX: IC1.P$10 R1-1K.1 R5-2K.2
SIM_STATUS: IC1.P$66 R23-1K.2
SIM_TX: IC1.P$9 U3.0
SR_DS: SHIFTOUTA.14 U3.18
SR_RST: SHIFTOUTA.10 SHIFTOUTB.10 SHIFTOUTC.10 SHIFTOUTD.10 SHIFTOUTE.10 SHIFTOUTF.10 SHIFTOUTG.10 SHIFTOUTH.10 SHIFTOUTI.10 SHIFTOUTJ.10 SHIFTOUTK.10 SHIFTOUTL.10 SHIFTOUTM.10 U3.19
STCP: SHIFTOUTA.12 SHIFTOUTB.12 SHIFTOUTC.12 SHIFTOUTD.12 SHIFTOUTE.12 SHIFTOUTF.12 SHIFTOUTG.12 SHIFTOUTH.12 SHIFTOUTI.12 SHIFTOUTJ.12 SHIFTOUTK.12 SHIFTOUTL.12 SHIFTOUTM.12 U3.17
USIM_CLK: D15.4 R10-22.2 U$5.3
USIM_DATA: D15.1 R11-22.2 U$5.4
USIM_RESET: D15.3 R9-22.2 U$5.2
USIM_VCC: C9-100N.1 C11-22P.1 CSIM_22P.2 CSIM_100N.2 D15.5 IC1.P$30 U$5.1
VCC: ACDC.VOUT IN1.9 IN2.9 IN3.9 IN4.9 IN5.9 IN6.9 IN7.9 IN8.9 IN9.9 IN10.9 IN11.9 IN12.9 IN13.9 JP1.1 JP1.2 OUTA.9 OUTB.9 OUTC.9 OUTD.9 OUTE.9 OUTF.9 OUTG.9 OUTH.9 OUTI.9 OUTJ.9 OUTK.9 OUTL.9 OUTM.9 R2K2_SCL.1 R2K2_SDA.1 RN1.1 RN2.1 RN3.1 RN4.1 RN5.1 RN6.1 RN7.1 RN8.1 RN9.1 RN10.1 RN11.1 RN12.1 RN13.1 SHIFT1.16 SHIFT2.16 SHIFT3.16 SHIFT4.16 SHIFT5.16 SHIFT6.16 SHIFT7.16 SHIFT8.16 SHIFT9.16 SHIFT10.16 SHIFT11.16 SHIFT12.16 SHIFT13.16 SHIFTOUTA.16 SHIFTOUTB.16 SHIFTOUTC.16 SHIFTOUTD.16 SHIFTOUTE.16 SHIFTOUTF.16 SHIFTOUTG.16 SHIFTOUTH.16 SHIFTOUTI.16 SHIFTOUTJ.16 SHIFTOUTK.16 SHIFTOUTL.16 SHIFTOUTM.16 U1.8 U3.5V@0 U3.5V@1 U3.5V@2 U$2.VIN
VIN: U3.VIN

## Tracks (layer width: path | path; a pad name or v marks a point on that pad's centre or on a via)
1-1
  Top 0.305: RN1.5 11.82,76.68 SHIFT1.11
  Top 0.813: RN1.5 6.92,81.59 6.92,95.04 15.78,103.9 IN1.1
1-2
  Top 0.305: RN1.4 10.55,75.41 SHIFT1.12
  Top 0.813: RN1.4 5.72,80.25 5.72,95.84 14.02,104.14 14.02,106.54 15.53,108.05 IN1.2
1-3
  Top 0.305: RN1.3 9.29,74.14 SHIFT1.13
  Top 0.406: 17.02,109.24 17.02,106.81 IN1.3
  Top 0.813: RN1.3 4.52,78.91 4.52,96.54 12.52,104.54 12.52,107.44 14.82,109.74 16.52,109.74 17.02,109.24
1-4
  Top 0.305: RN1.2 10.12,72.88 SHIFT1.14
  Top 0.813: RN1.2 3.32,77.57 3.32,97.24 11.02,104.84 11.02,108.14 14.02,111.14 17.02,111.14 18.32,110.04 IN1.4
1-5
  Top 0.305: RN1.6 13.92,81.98 16.22,79.68 16.22,74.68 18.02,72.88 SHIFT1.3
  Bottom 0.406: 18.52,103.64 20.39,105.51 IN1.5
  Bottom 0.813: RN1.6 8.08,81.98 3.22,86.84 3.22,96.14 9.62,102.54 17.42,102.54 18.52,103.64
1-6
  Top 0.305: RN1.7 12.2,84.52 16.82,79.88 16.82,75.18 17.92,74.08 20.29,74.08 SHIFT1.4
  Bottom 0.406: 20.02,103.34 20.82,104.14 21.32,104.14 22.12,104.94 22.12,106.79 IN1.6
  Bottom 0.813: RN1.7 8.24,84.52 4.62,88.14 4.62,95.64 10.02,101.04 17.72,101.04 20.02,103.34
1-7
  Top 0.305: RN1.8 10.14,85.98 11.52,85.98 13.86,83.65 15.52,81.98 17.42,80.08 17.42,76.18 18.19,75.41 SHIFT1.5
  Bottom 0.813: RN1.8 8,87.06 5.92,89.14 5.92,95.14 10.42,99.64 18.22,99.64 23.4,104.82 IN1.7
1-8
  Top 0.305: RN1.9 11.62,87.05 11.62,86.68 18.02,80.28 18.02,77.28 18.62,76.68 SHIFT1.6
  Bottom 0.406: 24.62,104.14 24.62,106.83 IN1.8
  Bottom 0.813: RN1.9 7.22,91.45 7.22,94.64 10.92,98.34 18.82,98.34 24.62,104.14
2-1
  Top 0.305: RN2.5 19.43,89.79 18.32,88.68 18.32,85.08 20.72,82.68 24.42,82.68 26.32,80.78 27.22,80.78 28.02,79.98 28.02,77.38 27.32,76.68 SHIFT2.11
  Top 0.813: RN2.5 19.43,95.15 20.22,95.94 24.52,95.94 31.62,103.04 31.62,110.84 26.72,115.74 26.72,118.7 IN2.1
2-2
  Top 0.305: RN2.4 17.72,93 17.72,84.88 20.52,82.08 22.22,82.08 23.32,80.98 23.32,76.78 24.72,75.38 26.22,75.38 SHIFT2.12
  Top 0.813: RN2.4 16.89,95.41 18.62,97.14 23.92,97.14 30.32,103.54 30.32,110.34 25.12,115.54 25.12,119.64 IN2.2
2-3
  Top 0.305: RN2.3 14.35,93.55 17.12,90.78 17.12,84.68 20.32,81.48 22.02,81.48 22.72,80.78 22.72,76.38 25.02,74.08 26.82,74.08 26.92,73.98 26.42,73.98 SHIFT2.13
  Top 0.406: 28.02,122.34 28.02,120.06 IN2.3
  Top 0.813: RN2.3 14.35,94.67 18.12,98.44 23.52,98.44 29.12,104.04 29.12,109.74 23.92,114.94 23.92,121.34 25.52,123.04 27.32,123.04 28.02,122.34
2-4
  Top 0.305: RN2.2 14.46,91.18 15.62,91.18 16.52,90.28 16.52,84.48 20.12,80.88 21.82,80.88 22.12,80.58 22.12,75.68 24.92,72.88 SHIFT2.14
  Top 0.813: RN2.2 17.62,99.64 23.02,99.64 27.92,104.54 27.92,109.14 22.62,114.44 22.62,121.74 25.22,124.34 28.22,124.34 29.32,123.24 IN2.4
2-5
  Top 0.305: RN2.6 21.97,91.53 18.92,88.48 18.92,85.28 20.92,83.28 24.62,83.28 26.52,81.38 27.42,81.38 28.62,80.18 28.62,73.78 29.52,72.88 SHIFT2.3
  Bottom 0.813: RN2.6 21.97,94.99 31.86,104.88 IN2.5
2-6
  Top 0.305: RN2.7 24.51,92.17 22.52,90.18 21.42,90.18 19.52,88.28 19.52,85.48 21.12,83.88 24.82,83.88 26.72,81.98 27.62,81.98 29.22,80.38 29.22,74.88 29.92,74.18 32.37,74.18 SHIFT2.4
  Bottom 0.406: 33.12,117.54 33.12,120.04 IN2.6
  Bottom 0.813: RN2.7 24.51,95.93 33.12,104.54 33.12,117.54
2-7
  Top 0.305: RN2.8 22.8,89.58 21.62,89.58 20.12,88.08 20.12,85.68 21.32,84.48 25.02,84.48 26.92,82.58 27.82,82.58 29.82,80.58 29.82,75.88 30.32,75.38 32.37,75.38 SHIFT2.5
  Bottom 0.813: RN2.8 26.95,96.67 34.32,104.14 34.32,118.68 IN2.7 34.42,118.64
2-8
  Top 0.305: RN2.9 24.74,88.98 21.82,88.98 20.72,87.88 20.72,85.88 21.52,85.08 25.22,85.08 27.12,83.18 28.02,83.18 30.42,80.78 30.42,76.98 30.82,76.58 32.3,76.58 SHIFT2.6
  Bottom 0.406: 35.67,117.69 35.67,120.03 IN2.8
  Bottom 0.813: RN2.9 29.59,97.61 35.32,103.44 35.62,103.74 35.67,117.69
3-1
  Top 0.305: RN3.5 32.51,84.29 35.82,80.98 39.22,80.98 40.52,79.68 40.52,77.18 40.02,76.68 SHIFT3.11
  Top 0.813: RN3.5 32.51,88.63 34.82,90.94 34.82,96.34 39.12,100.64 IN3.1
3-2
  Top 0.305: RN3.4 29.97,84.63 31.12,83.48 32.52,83.48 35.32,80.68 35.32,76.38 36.29,75.41 SHIFT3.12
  Top 0.813: RN3.4 29.97,87.69 33.72,91.44 33.72,97.34 37.52,101.14 37.52,106.44 IN3.2
3-3
  Top 0.305: RN3.3 27.43,86.27 30.82,82.88 32.32,82.88 34.72,80.48 34.72,74.78 35.52,73.98 38.32,73.98 SHIFT3.13
  Top 0.406: 40.42,109.34 40.42,106.76 IN3.3
  Top 0.813: RN3.3 27.56,86.88 27.56,87.88 28.82,89.14 29.82,89.14 32.62,91.94 32.62,98.34 36.22,101.94 36.22,107.74 38.42,109.94 39.82,109.94 40.42,109.34
3-4
  Top 0.305: RN3.2 27.39,84.38 28.42,84.38 30.52,82.28 32.12,82.28 34.12,80.28 34.12,73.98 35.32,72.78 38.39,72.78 SHIFT3.14
  Top 0.813: RN3.2 24.89,87.31 28.02,90.44 29.52,90.44 31.52,92.44 31.52,99.24 34.92,102.64 34.92,108.14 37.92,111.14 40.42,111.14 41.62,109.94 41.62,108.1 IN3.4
3-5
  Top 0.305: RN3.6 35.05,82.55 36.02,81.58 39.42,81.58 41.12,79.88 41.12,74.08 42.42,72.78 44.54,72.78 SHIFT3.3
  Bottom 0.813: IN3.5 40.54,101.84 36.22,101.84 31.32,96.94 31.32,91.04 35.05,87.31 RN3.6
3-6
  Top 0.305: RN3.7 37.59,84.21 41.72,80.08 41.72,75.48 43.02,74.18 44.6,74.18 SHIFT3.4
  Bottom 0.406: 45.52,104.44 45.52,106.74 IN3.6
  Bottom 0.813: RN3.7 37.59,88.27 36.72,89.14 34.92,89.14 32.52,91.54 32.52,96.44 36.72,100.64 41.12,100.64 44.02,103.54 44.62,103.54 45.52,104.44
3-7
  Top 0.305: RN3.8 40.13,82.47 42.32,80.28 42.32,76.58 43.52,75.38 44.6,75.38 SHIFT3.5
  Bottom 0.813: RN3.8 40.13,87.83 37.52,90.44 35.32,90.44 33.72,92.04 33.72,95.94 37.22,99.44 41.62,99.44 44.52,102.34 45.42,102.34 46.75,103.77 IN3.7
3-8
  Top 0.305: RN3.9 42.67,80.73 42.92,80.48 42.92,77.38 43.62,76.68 SHIFT3.6
  Bottom 0.406: 48.02,104.34 48.02,106.78 IN3.8
  Bottom 0.813: RN3.9 42.67,87.29 38.22,91.74 35.72,91.74 34.92,92.54 34.92,95.44 37.72,98.24 42.12,98.24 45.02,101.14 46.02,101.14 48.02,103.14 48.02,104.34
4-1
  Top 0.305: RN4.5 46.62,93.72 46.62,84.68 48.82,82.48 50.72,82.48 52.62,80.58 52.62,77.18 52.12,76.68 SHIFT4.11
  Top 0.813: RN4.5 46.78,96.5 47.42,97.14 49.22,97.14 54.92,102.84 54.92,111.51 50.44,115.99 IN4.1
4-2
  Top 0.305: RN4.4 46.02,92.1 46.02,83.28 47.62,81.68 47.62,76.38 48.62,75.38 50.59,75.38 SHIFT4.12
  Top 0.813: RN4.4 44.24,97.26 45.22,98.24 48.52,98.24 53.72,103.44 53.72,110.84 48.52,116.04 48.52,119.41 IN4.2
4-3
  Top 0.305: RN4.3 43.7,91.88 44.82,91.88 45.42,91.28 45.42,83.08 47.02,81.48 47.02,76.18 49.02,74.18 50.59,74.18 SHIFT4.13
  Top 0.406: 51.72,122.34 51.72,120.05 IN4.3
  Top 0.813: RN4.3 41.7,96.42 44.62,99.34 47.92,99.34 52.52,103.94 52.52,110.14 47.32,115.34 47.32,120.64 49.72,123.04 51.02,123.04 51.72,122.34
4-4
  Top 0.305: RN4.2 41.76,91.28 44.52,91.28 44.82,90.98 44.82,82.88 46.42,81.28 46.42,75.58 49.02,72.98 50.52,72.98 SHIFT4.14
  Top 0.813: RN4.2 39.16,95.48 44.12,100.44 47.32,100.44 51.32,104.44 51.32,109.64 46.12,114.84 46.12,121.14 49.22,124.24 51.72,124.24 52.98,123.18 IN4.4
4-5
  Top 0.305: RN4.6 49.32,91.08 47.22,88.98 47.22,84.88 49.02,83.08 50.92,83.08 53.22,80.78 53.22,74.98 55.32,72.88 SHIFT4.3
  Bottom 0.813: RN4.6 49.32,96.34 55.52,102.54 IN4.5
4-6
  Top 0.305: RN4.7 51.86,92.82 47.82,88.78 47.82,85.08 49.22,83.68 51.12,83.68 53.82,80.98 53.82,75.78 55.42,74.18 56.74,74.18 SHIFT4.4
  Bottom 0.406: 56.82,117.54 56.82,120.03 IN4.6
  Bottom 0.813: RN4.7 51.86,97.18 56.72,102.04 56.72,117.44 56.82,117.54
4-7
  Top 0.305: RN4.8 54.4,91.96 53.32,90.88 50.72,90.88 48.42,88.58 48.42,85.28 49.42,84.28 51.32,84.28 54.42,81.18 54.42,76.58 55.62,75.38 56.74,75.38 SHIFT4.5
  Bottom 0.813: RN4.8 54.4,98.02 57.92,101.54 57.92,118.65 IN4.7
4-8
  Top 0.305: RN4.9 56.94,92.3 54.92,90.28 50.92,90.28 49.02,88.38 49.02,85.48 49.62,84.88 51.52,84.88 55.02,81.38 55.02,77.68 56.02,76.68 SHIFT4.6
  Bottom 0.406: 59.32,117.64 59.32,120.07 IN4.8
  Bottom 0.813: RN4.9 56.94,98.76 59.22,101.04 59.22,117.54 59.32,117.64
5-1
  Top 0.305: RN5.5 60.98,86.62 64.62,82.98 64.62,77.68 63.62,76.68 SHIFT5.11
  Top 0.813: RN5.5 60.98,89.6 62.62,91.24 62.62,105.4 IN5.1
5-2
  Top 0.305: RN5.4 59.82,85.5 59.82,76.88 61.29,75.41 SHIFT5.12
  Top 0.813: RN5.4 58.44,88.86 61.32,91.74 61.32,106.64 IN5.2
5-3
  Top 0.305: RN5.3 57.9,84.88 58.42,84.88 59.22,84.08 59.22,76.58 61.66,74.14 SHIFT5.13
  Top 0.406: 64.02,109.34 64.02,106.8 IN5.3
  Top 0.813: RN5.3 55.9,88.02 60.12,92.24 60.12,108.14 62.02,110.04 63.32,110.04 64.02,109.34
5-4
  Top 0.305: RN5.2 56.06,84.18 57.82,84.18 58.62,83.38 58.62,76.18 61.93,72.88 SHIFT5.14
  Top 0.813: RN5.2 53.36,88.58 53.82,89.04 55.32,89.04 58.92,92.64 58.92,109.34 61.02,111.44 64.22,111.44 65.32,110.34 65.32,108.1 IN5.4
5-5
  Top 0.305: RN5.6 63.52,85.38 65.22,83.68 65.22,75.58 67.92,72.88 SHIFT5.3
  Bottom 0.61: 58.72,90.54 58.72,90.04 59.82,88.94 62.42,88.94 63.52,87.84 RN5.6
  Bottom 0.813: 58.72,90.54 58.72,96.64 63.42,101.34 65.12,101.34 67.82,104.04 IN5.5
5-6
  Top 0.305: RN5.7 65.82,86.64 65.82,76.18 67.92,74.08 68.85,74.08 SHIFT5.4
  Bottom 0.406: 69.12,104.34 69.12,106.78 IN5.6
  Bottom 0.61: 59.92,91.14 59.92,90.34 60.32,89.94 63.72,89.94 66.02,87.64 66.02,86.92 RN5.7
  Bottom 0.813: 59.92,91.14 59.92,96.24 63.72,100.04 65.42,100.04 69.12,103.74 69.12,104.34
5-7
  Top 0.305: RN5.8 68.6,84.16 66.42,81.98 66.42,76.78 67.82,75.38 68.88,75.38 SHIFT5.5
  Bottom 0.61: 61.12,91.94 61.12,91.34 61.52,90.94 65.12,90.94 68.62,87.54 68.62,86.96 RN5.8
  Bottom 0.813: 61.12,91.94 61.12,95.74 64.12,98.74 65.82,98.74 70.32,103.24 70.32,105.48 IN5.7
5-8
  Top 0.305: RN5.9 71.14,85.8 67.02,81.68 67.02,77.48 67.82,76.68 SHIFT5.6
  Bottom 0.406: IN5.8 71.62,106.82 71.62,104.34
  Bottom 0.61: 62.32,92.44 62.92,91.94 66.08,91.94 RN5.9
  Bottom 0.813: 71.62,104.34 71.62,102.84 66.22,97.44 64.52,97.44 62.32,95.24 62.32,92.44
6-1
  Top 0.305: RN6.5 74.62,93.84 74.62,84.88 76.62,82.88 76.62,77.38 75.92,76.68 SHIFT6.11
  Top 0.813: RN6.5 74.53,98.55 78.52,102.54 78.52,111.14 73.81,115.85 IN6.1
6-2
  Top 0.305: RN6.4 71.99,93.41 74.02,91.38 74.02,81.58 73.62,81.18 72.42,81.18 71.92,80.68 71.92,76.88 73.42,75.38 74.87,75.38 SHIFT6.12
  Top 0.813: RN6.4 71.99,97.81 77.32,103.14 77.32,110.44 71.72,116.04 71.72,119.23 IN6.2
6-3
  Top 0.305: RN6.3 69.45,93.25 71.22,91.48 73.12,91.48 73.42,91.18 73.42,82.08 73.12,81.78 72.22,81.78 71.32,80.88 71.32,76.58 73.72,74.18 74.87,74.18 SHIFT6.13
  Top 0.406: 75.12,122.44 75.12,120.01 IN6.3
  Top 0.813: RN6.3 69.45,97.07 76.12,103.74 76.12,109.84 70.42,115.54 70.42,120.34 72.92,122.84 74.62,122.84 75.12,122.44
6-4
  Top 0.305: RN6.2 66.91,93.19 69.22,90.88 72.72,90.88 72.82,90.78 72.82,82.58 72.62,82.38 72.02,82.38 70.72,81.08 70.72,76.08 74.02,72.78 74.81,72.78 SHIFT6.14
  Top 0.813: RN6.2 66.91,96.33 74.92,104.34 74.92,109.24 68.92,115.24 68.92,121.04 72.12,124.24 75.32,124.24 76.42,123.14 76.42,121.39 IN6.4
6-5
  Top 0.305: RN6.6 77.07,93.03 75.22,91.18 75.22,85.08 77.22,83.08 77.22,73.58 77.92,72.78 80.96,72.78 SHIFT6.3
  Bottom 0.813: RN6.6 77.07,95.99 78.92,97.84 78.92,118.81 IN6.5
6-6
  Top 0.305: RN6.7 79.61,92.57 79.02,91.98 77.92,91.98 75.82,89.88 75.82,85.28 77.82,83.28 77.82,74.98 78.62,74.18 81.02,74.18 SHIFT6.4
  Bottom 0.406: 80.12,117.64 80.12,120.09 IN6.6
  Bottom 0.813: RN6.7 79.61,96.43 80.12,96.94 80.12,117.64
6-7
  Top 0.305: RN6.8 82.15,93.41 79.82,91.08 78.12,91.08 76.42,89.38 76.42,85.48 78.42,83.48 78.42,76.38 79.39,75.41 SHIFT6.5
  Bottom 0.813: RN6.8 81.43,94.65 IN6.7
6-8
  Top 0.305: RN6.9 84.69,93.85 81.12,90.28 78.32,90.28 77.02,88.98 77.02,85.68 79.02,83.68 79.02,77.38 79.72,76.68 SHIFT6.6
  Bottom 0.406: 82.72,117.74 82.72,120.03 IN6.8
  Bottom 0.813: RN6.9 84.69,95.07 82.72,97.04 82.72,117.74
7-1
  Top 0.305: RN7.5 89.05,77.61 88.12,76.68 SHIFT7.11
  Top 0.813: RN7.5 89.05,89.87 90.32,91.14 90.32,101.38 IN7.1
7-2
  Top 0.305: RN7.4 86.51,82.47 84.02,79.98 84.02,77.08 85.69,75.41 SHIFT7.12
  Top 0.813: RN7.4 86.51,89.03 89.02,91.54 89.02,100.24 84.32,104.94 84.32,106.48 IN7.2
7-3
  Top 0.305: RN7.3 83.42,86.33 83.42,76.58 85.86,74.14 SHIFT7.13
  Top 0.406: 87.32,109.44 87.32,106.92 IN7.3
  Top 0.813: RN7.3 83.97,88.29 87.72,92.04 87.72,99.74 83.12,104.34 83.12,107.84 85.32,110.04 86.72,110.04 87.32,109.44
7-4
  Top 0.305: RN7.2 82.82,85.49 82.82,75.98 85.92,72.88 SHIFT7.14
  Top 0.813: RN7.2 81.43,87.55 86.42,92.54 86.42,99.14 81.92,103.74 81.92,108.34 84.92,111.34 87.82,111.34 88.62,110.54 88.62,108.24 IN7.4
7-5
  Top 0.305: RN7.6 91.59,84.85 89.62,82.88 89.62,75.38 92.12,72.88 SHIFT7.3
  Bottom 0.61: 86.72,90.64 88.42,88.94 90.82,88.94 91.59,88.17 RN7.6
  Bottom 0.813: 86.72,90.64 86.72,101.26 IN7.5
7-6
  Top 0.305: RN7.7 94.13,85.09 93.42,84.38 92.12,84.38 90.22,82.48 90.22,76.18 92.22,74.18 93.16,74.18 SHIFT7.4
  Bottom 0.406: IN7.6 92.42,106.9 92.42,104.74
  Bottom 0.61: 87.92,91.84 87.92,90.84 88.82,89.94 91.82,89.94 94.12,87.64 RN7.7
  Bottom 0.813: 92.42,104.74 87.92,100.24 87.92,91.84
7-7
  Top 0.305: RN7.8 96.67,85.73 94.42,83.48 92.32,83.48 90.82,81.98 90.82,76.78 92.12,75.48 93.13,75.48 SHIFT7.5
  Bottom 0.61: 89.12,93.04 89.12,91.34 89.52,90.94 93.02,90.94 94.62,89.34 95.82,89.34 96.62,88.54 96.62,86.93 RN7.8
  Bottom 0.813: IN7.7 93.66,104.18 89.12,99.64 89.12,93.04
7-8
  Top 0.305: SHIFT7.6 92.31,76.68 91.42,77.58 91.42,81.58 92.52,82.68 95.66,82.68 99.22,86.24 RN7.9
  Bottom 0.406: IN7.8 93.82,108.14 94.92,107.04 94.92,104.64
  Bottom 0.61: 90.32,94.04 90.32,92.64 91.02,91.94 93.52,91.94 95.12,90.34 97.42,90.34 99.22,88.54 RN7.9
  Bottom 0.813: 94.92,104.64 94.92,103.54 90.32,98.94 90.32,94.04
8-1
  Top 0.305: RN8.5 102.08,92.52 103.92,90.68 103.92,84.88 101.02,81.98 101.02,77.38 100.32,76.68 SHIFT8.11
  Top 0.813: RN8.5 102.08,98.9 101.92,99.14 101.92,111.57 97.83,115.66 IN8.1
8-2
  Top 0.305: RN8.4 99.77,94.03 103.32,90.48 103.32,85.18 100.42,82.28 98.52,82.28 96.22,79.98 96.22,76.08 96.82,75.48 99.12,75.48 SHIFT8.12
  Top 0.813: RN8.4 99.54,98.86 100.62,99.94 100.62,110.84 96.22,115.24 96.22,119.99 IN8.2
8-3
  Top 0.305: RN8.3 97,93.4 98.42,91.98 101.02,91.98 102.72,90.28 102.72,85.48 100.12,82.88 98.32,82.88 95.62,80.18 95.62,75.58 97.02,74.18 99.15,74.18 SHIFT8.13
  Top 0.406: 99.12,122.84 99.12,120.31 IN8.3
  Top 0.813: RN8.3 97,98.22 99.42,100.64 99.42,110.14 94.92,114.64 94.92,121.34 96.92,123.24 98.72,123.24 99.12,122.84
8-4
  Top 0.305: RN8.2 97.11,91.38 100.82,91.38 102.12,90.08 102.12,85.68 99.92,83.48 98.12,83.48 95.02,80.38 95.02,75.28 97.42,72.88 SHIFT8.14
  Top 0.813: RN8.2 94.46,97.48 98.22,101.24 98.22,109.64 93.62,114.24 93.62,121.84 96.32,124.54 99.82,124.54 100.32,124.04 100.32,121.65 IN8.4
8-5
  Top 0.305: RN8.6 104.52,93.93 104.52,84.58 101.62,81.68 101.62,74.98 103.82,72.78 105.24,72.78 SHIFT8.3
  Bottom 0.813: RN8.6 104.62,97.94 102.82,99.74 102.82,118.97 IN8.5
8-6
  Top 0.305: RN8.7 107.16,92.72 105.12,90.68 105.12,84.38 102.22,81.48 102.22,75.78 103.75,74.24 SHIFT8.4
  Bottom 0.406: 104.12,117.84 104.12,120.39 IN8.6
  Bottom 0.813: RN8.7 107.16,97.3 104.22,100.24 104.22,117.74 104.12,117.84
8-7
  Top 0.305: RN8.8 109.7,93.66 107.12,91.08 106.62,91.08 105.72,90.18 105.72,84.18 102.82,81.28 102.82,76.38 103.82,75.38 105.3,75.38 SHIFT8.5
  Bottom 0.813: RN8.8 109.7,96.56 105.45,100.81 IN8.7
8-8
  Top 0.305: RN8.9 108.59,90.38 106.82,90.38 106.32,89.88 106.32,83.98 103.42,81.08 103.42,77.48 104.22,76.68 SHIFT8.6
  Bottom 0.406: 106.72,117.84 106.72,120.33 IN8.8
  Bottom 0.813: RN8.9 112.24,95.82 106.72,101.34 106.72,117.84
9-1
  Top 0.305: RN9.5 118.22,85.88 113.32,80.98 113.32,77.38 112.52,76.58 111.43,76.58 SHIFT9.11
  Top 0.813: RN9.5 118.22,90.54 118.32,90.64 118.32,97.42 IN9.1
9-2
  Top 0.305: RN9.4 115.68,84.54 112.72,81.58 109.42,81.58 108.32,80.48 108.32,76.88 109.82,75.38 111.29,75.38 SHIFT9.12
  Top 0.813: RN9.4 115.68,90.1 116.92,91.34 116.92,96.94 110.02,103.84 109.32,103.84 108.32,104.84 108.32,106.34 IN9.2
9-3
  Top 0.305: RN9.3 113.14,84.6 111.32,82.78 109.92,82.78 107.72,80.68 107.72,76.48 110.02,74.18 111.29,74.18 SHIFT9.13
  Top 0.406: 111.42,109.44 111.42,106.86 IN9.3
  Top 0.813: RN9.3 113.14,89.66 115.42,91.94 115.42,96.54 109.42,102.54 108.72,102.54 107.02,104.24 107.02,107.64 109.42,110.04 110.82,110.04 111.42,109.44
9-4
  Top 0.305: RN9.2 110.6,84.46 107.12,80.88 107.12,75.78 109.92,72.98 SHIFT9.14
  Top 0.813: RN9.2 110.6,89.12 114.02,92.54 114.02,95.94 108.72,101.24 108.02,101.24 105.72,103.54 105.72,108.24 109.02,111.54 111.52,111.54 112.62,110.44 112.62,108.2 IN9.4
9-5
  Top 0.305: RN9.6 120.76,85.52 118.22,82.98 116.12,82.98 113.92,80.78 113.92,75.38 116.42,72.88 SHIFT9.3
  Bottom 0.61: 115.22,91.24 115.22,90.44 116.32,89.24 119.52,89.24 120.72,88.14 120.72,87.22 RN9.6
  Bottom 0.813: IN9.5 115.21,97.03 115.22,95.64 115.22,91.24
9-6
  Top 0.305: RN9.7 123.3,84.76 122.82,84.28 120.32,84.28 118.42,82.38 116.32,82.38 114.52,80.58 114.52,76.08 116.42,74.18 117.44,74.18 SHIFT9.4
  Bottom 0.406: IN9.6 116.52,106.84 116.52,104.74
  Bottom 0.61: 116.52,91.74 116.52,90.84 117.32,90.14 120.42,90.14 121.42,89.14 122.42,89.14 123.32,88.24 123.32,87.2 RN9.7
  Bottom 0.813: 116.52,104.74 116.52,91.74
9-7
  Top 0.305: RN9.8 125.84,85.5 124.02,83.68 120.52,83.68 118.62,81.78 116.52,81.78 115.12,80.38 115.12,76.68 116.42,75.38 117.44,75.38 SHIFT9.5
  Bottom 0.61: 117.72,92.34 117.72,91.64 118.32,91.04 121.12,91.04 121.92,90.24 123.72,90.24 125.82,88.14 125.82,87.2 RN9.8
  Bottom 0.813: IN9.7 117.75,95.97 117.72,94.64 117.72,92.34
9-8
  Top 0.305: RN9.9 128.32,87.18 124.12,82.98 120.72,82.98 118.92,81.18 116.72,81.18 115.72,80.18 115.72,77.38 116.42,76.68 SHIFT9.6
  Bottom 0.406: IN9.8 119.02,106.88 119.02,104.74
  Bottom 0.61: 119.02,93.14 119.02,92.84 119.92,91.94 121.72,91.94 122.42,91.24 124.22,91.24 126.12,89.34 127.22,89.34 128.42,88.14 128.42,87.22 RN9.9
  Bottom 0.813: 119.02,104.74 119.02,93.14
10-1
  Top 0.305: RN10.5 131.13,92.67 132.62,91.18 132.62,86.28 130.02,83.68 128.02,83.68 125.32,80.98 125.32,77.38 124.62,76.68 SHIFT10.11
  Top 0.813: RN10.5 131.13,96.03 125.82,101.34 125.82,111.61 121.74,115.69 IN10.1
10-2
  Top 0.305: RN10.4 132.02,90.6 132.02,86.48 129.82,84.28 127.82,84.28 124.72,81.18 121.32,81.18 120.52,80.38 120.52,76.98 122.12,75.38 123.43,75.38 SHIFT10.12
  Top 0.813: RN10.4 128.59,96.47 124.62,100.44 124.62,110.94 119.92,115.64 119.92,119.41 IN10.2
10-3
  Top 0.305: RN10.3 128,92.08 129.72,92.08 131.42,90.38 131.42,86.68 129.62,84.88 127.62,84.88 124.52,81.78 121.12,81.78 119.92,80.58 119.92,76.48 122.22,74.18 123.43,74.18 SHIFT10.13
  Top 0.406: 123.02,122.44 123.02,119.95 IN10.3
  Top 0.813: RN10.3 126.05,97.01 123.42,99.64 123.42,110.34 118.62,115.14 118.62,120.54 121.32,123.24 122.22,123.24 123.02,122.44
10-4
  Top 0.305: RN10.2 126.06,91.48 129.32,91.48 130.82,89.98 130.82,86.88 129.42,85.48 127.42,85.48 124.32,82.38 120.92,82.38 119.32,80.78 119.32,76.18 122.62,72.88 SHIFT10.14
  Top 0.813: RN10.2 123.51,97.65 122.22,98.94 122.22,109.74 117.32,114.64 117.32,121.04 120.82,124.54 123.12,124.54 124.22,123.44 124.22,121.29 IN10.4
10-5
  Top 0.305: RN10.6 133.67,90.33 133.22,89.88 133.22,86.08 130.22,83.08 128.22,83.08 125.92,80.78 125.92,75.38 128.42,72.88 SHIFT10.3
  Bottom 0.813: RN10.6 133.67,95.09 126.82,101.94 IN10.5
10-6
  Top 0.305: RN10.7 136.21,92.07 133.82,89.68 133.82,85.88 130.42,82.48 128.42,82.48 126.52,80.58 126.52,75.88 128.32,74.08 129.55,74.08 SHIFT10.4
  Bottom 0.406: 128.12,117.44 128.12,119.93 IN10.6
  Bottom 0.813: RN10.7 136.21,94.65 128.12,102.74 128.12,117.44
10-7
  Top 0.305: RN10.8 138.75,93.71 134.42,89.38 134.42,85.68 130.62,81.88 128.62,81.88 127.12,80.38 127.12,76.68 128.42,75.38 129.58,75.38 SHIFT10.5
  Bottom 0.813: RN10.8 138.75,94.61 129.36,104 IN10.7
10-8
  Top 0.305: RN10.9 141.29,93.45 139.32,91.48 137.42,91.48 135.02,89.08 135.02,85.48 130.82,81.28 128.82,81.28 127.72,80.18 127.72,77.48 128.52,76.68 SHIFT10.6
  Bottom 0.406: 130.62,117.54 130.62,119.97 IN10.8
  Bottom 0.813: RN10.9 141.29,94.97 139.62,96.64 138.82,96.64 130.62,104.84 130.62,117.54
11-1
  Top 0.305: RN11.5 144.89,85.68 143.32,85.68 142.12,84.48 139.32,84.48 137.42,82.58 137.42,77.28 136.82,76.68 SHIFT11.11
  Top 0.813: RN11.5 146.72,87.58 146.72,97.24 140.72,103.14 137.36,103.14 IN11.1
11-2
  Top 0.305: RN11.4 141.75,85.08 139.02,85.08 135.82,81.88 133.82,81.88 132.62,80.68 132.62,76.78 133.98,75.41 SHIFT11.12
  Top 0.813: RN11.4 144.25,90.47 145.52,91.74 145.52,96.64 140.22,101.94 136.12,101.94 133.12,104.94 133.12,106.7 IN11.2
11-3
  Top 0.305: RN11.3 139.81,85.68 138.82,85.68 135.62,82.48 133.62,82.48 132.02,80.88 132.02,76.38 134.25,74.14 SHIFT11.13
  Top 0.406: 136.02,109.64 136.02,107.12 IN11.3
  Top 0.813: RN11.3 141.71,89.63 144.32,92.24 144.32,95.94 139.52,100.74 135.42,100.74 131.82,104.34 131.82,108.24 133.62,110.04 135.62,110.04 136.02,109.64
11-4
  Top 0.305: RN11.2 139.17,86.83 135.42,83.08 133.42,83.08 131.42,81.08 131.42,75.68 134.22,72.88 SHIFT11.14
  Top 0.813: RN11.2 139.17,88.79 143.12,92.74 143.12,95.34 138.92,99.54 134.82,99.54 130.52,103.84 130.52,108.84 133.22,111.54 136.52,111.54 137.42,110.64 137.42,108.46 IN11.4
11-5
  Top 0.305: RN11.6 147.43,85.68 146.02,85.68 145.42,85.08 143.62,85.08 142.42,83.88 139.52,83.88 138.02,82.38 138.02,73.98 139.12,72.88 SHIFT11.3
  Bottom 0.61: 143.12,92.64 143.12,91.94 145.52,89.54 148.32,89.54 149.42,88.44 149.42,87.67 RN11.6
  Bottom 0.813: IN11.5 139.86,98.9 143.12,95.64 143.12,92.64
11-6
  Top 0.305: RN11.7 150.07,85.78 148.72,85.78 148.02,85.08 146.32,85.08 145.72,84.48 143.92,84.48 142.72,83.28 139.72,83.28 138.62,82.18 138.62,75.08 139.55,74.14 SHIFT11.4
  Bottom 0.406: IN11.6 141.12,107.1 141.12,104.74
  Bottom 0.61: 144.32,92.64 144.32,92.14 146.02,90.44 150.82,90.44 151.92,89.34 151.92,87.63 RN11.7
  Bottom 0.813: 141.12,104.74 141.12,99.44 144.32,96.24 144.32,92.64
11-7  (1 unrouted)
  Top 0.305: SHIFT11.5 139.78,75.41 139.22,75.98 139.22,81.98 139.92,82.68 142.92,82.68 144.12,83.88 145.92,83.88 146.52,84.48 148.22,84.48 148.92,85.18 150.92,85.18 151.52,85.78 152.82,85.78 154.22,87.18 RN11.8
  Bottom 0.61: 145.52,92.74 145.52,92.34 146.52,91.34 152.42,91.34 154.42,89.34 RN11.8
  Bottom 0.813: 142.4,104.7 142.4,99.96 145.52,96.84 145.52,92.74
11-8
  Top 0.305: RN11.9 154.55,85.18 151.72,85.18 151.02,84.58 149.12,84.58 148.42,83.88 146.72,83.88 146.12,83.28 144.32,83.28 142.52,81.48 140.22,81.48 139.82,81.08 139.82,77.28 140.41,76.68 SHIFT11.6
  Bottom 0.406: IN11.8 143.72,107.04 143.72,104.74
  Bottom 0.61: 146.72,92.84 147.32,92.24 153.32,92.24 156.82,88.74 156.82,87.71 RN11.9
  Bottom 0.813: 143.72,104.74 143.72,100.44 146.72,97.44 146.72,92.84
12-1
  Top 0.305: 157.96,82.78 152.52,82.78 150.72,80.98 150.72,77.48 149.92,76.68 SHIFT12.11
  Top 0.406: 157.96,82.78 163.12,87.94 163.12,90.54 161.52,92.14 160.32,92.14 158.78,93.68 RN12.5
  Top 0.813: RN12.5 158.78,96.18 150.42,104.54 150.42,111.57 145.89,116.1 IN12.1
12-2
  Top 0.305: 157.56,83.38 152.32,83.38 151.02,82.08 147.42,82.08 145.92,80.58 145.92,76.58 147.12,75.38 148.81,75.38 SHIFT12.12
  Top 0.406: 157.56,83.38 162.12,87.94 162.12,90.24 161.02,91.34 160.02,91.34 159.12,92.24 158.12,92.24 156.24,94.12 RN12.4
  Top 0.813: RN12.4 156.24,96.82 149.22,103.84 149.22,110.94 144.22,115.94 144.22,119.47 IN12.2
12-3
  Top 0.305: 157.16,83.98 152.12,83.98 150.82,82.68 147.22,82.68 144.92,80.38 144.92,75.28 146.02,74.18 148.81,74.18 SHIFT12.13
  Top 0.406: 157.16,83.98 161.22,88.04 161.22,89.94 160.72,90.44 159.72,90.44 158.72,91.44 157.72,91.44 156.92,92.24 155.64,92.24 RN12.3 | 147.12,122.34 147.12,119.91 IN12.3
  Top 0.61: 153.72,94.16 RN12.3
  Top 0.813: RN12.3 153.7,97.46 148.02,103.14 148.02,110.34 143.02,115.44 143.02,120.74 145.22,122.94 146.52,122.94 147.12,122.34
12-4
  Top 0.305: 156.66,84.58 151.82,84.58 150.52,83.28 147.02,83.28 143.92,80.28 143.92,74.28 145.42,72.78 148.75,72.78 SHIFT12.14
  Top 0.406: 156.66,84.58 160.42,88.34 160.42,89.54 160.32,89.64 159.32,89.64 158.32,90.64 157.32,90.64 156.52,91.44 155.12,91.44 154.42,92.14 153.2,92.14 RN12.2
  Top 0.61: 151.12,94.14 RN12.2
  Top 0.813: RN12.2 151.26,98.1 146.82,102.54 146.82,109.84 141.82,114.84 141.82,121.74 144.52,124.44 147.72,124.44 148.52,123.64 148.52,121.23 IN12.4
12-5
  Top 0.305: 158.36,82.18 152.82,82.18 151.32,80.78 151.32,73.48 152.02,72.78 154.9,72.78 SHIFT12.3
  Top 0.406: 158.36,82.18 164.22,88.04 164.22,91.04 161.32,93.94 RN12.6
  Bottom 0.813: RN12.6 161.32,96.14 160.52,96.94 154.52,96.94 150.92,100.54 150.92,118.55 IN12.5
12-6
  Top 0.305: 158.76,81.58 153.02,81.58 151.92,80.48 151.92,74.88 152.62,74.18 154.96,74.18 SHIFT12.4
  Top 0.406: 158.76,81.58 165.22,88.04 165.22,92.34 163.86,93.7 RN12.7
  Bottom 0.406: IN12.6 152.22,119.89 152.22,117.44
  Bottom 0.813: RN12.7 163.86,95.8 161.42,98.24 155.12,98.24 152.12,101.24 152.12,117.34 152.22,117.44
12-7
  Top 0.305: 159.16,80.98 153.32,80.98 152.52,80.18 152.52,75.98 153.12,75.38 154.96,75.38 SHIFT12.5
  Top 0.406: 159.16,80.98 166.4,88.22 RN12.8
  Top 0.61: 166.62,93.96 RN12.8
  Bottom 0.813: RN12.8 166.4,95.36 162.12,99.64 155.62,99.64 153.42,101.84 153.42,118.51 IN12.7
12-8
  Top 0.305: 159.56,80.38 153.62,80.38 153.12,79.88 153.12,77.18 153.61,76.68 SHIFT12.6 | 167.34,88.16 167.34,91.56 169.02,93.24 169.02,94.1 RN12.9
  Top 0.406: 159.56,80.38 167.34,88.16
  Top 0.61: 168.92,94.16 RN12.9
  Bottom 0.406: IN12.8 154.82,119.83 154.82,117.34
  Bottom 0.813: RN12.9 168.94,94.92 162.82,101.04 156.22,101.04 154.82,102.44 154.82,117.34
13-1  (via drill 0.6)
  Top 0.305: v163.22,82.48 163.22,77.68 162.22,76.68 SHIFT13.11
  Top 0.813: RN13.5 173.5,80.92 178.92,86.34 178.92,99.64 174.52,104.04 174.52,111.04 171.02,114.54 159.62,114.54 156.52,111.44 156.52,107.58 IN13.1
  Bottom 0.305: RN13.5 172.18,80.28 164.62,80.28 163.22,81.68 v163.22,82.48
13-2  (via drill 0.6)
  Top 0.305: v164.52,82.48 164.52,81.38 163.82,80.68 163.82,76.78 162.42,75.38 161.02,75.38 SHIFT13.12
  Top 0.813: RN13.4 173.64,83.46 177.62,87.44 177.62,98.74 173.02,103.34 173.02,110.54 170.32,113.24 160.32,113.24 158.02,110.94 158.02,108.62 IN13.2
  Bottom 0.305: RN13.4 172.7,83.46 170.12,80.88 165.02,80.88 164.52,81.38 v164.52,82.48
13-3  (via drill 0.6)
  Top 0.305: v165.82,82.48 165.82,81.88 164.42,80.48 164.42,76.38 162.22,74.18 161.02,74.18 SHIFT13.13
  Top 0.406: 159.42,109.84 159.42,107.22 IN13.3
  Top 0.813: RN13.3 173.58,86 176.32,88.74 176.32,97.84 171.62,102.54 171.62,109.84 169.52,111.94 161.02,111.94 159.42,110.34 159.42,109.84
  Bottom 0.305: RN13.3 172.82,85.98 168.32,81.48 166.52,81.48 165.82,82.18 v165.82,82.48
13-4  (via drill 0.6)
  Top 0.305: v167.12,82.48 167.12,82.38 165.02,80.28 165.02,75.58 162.32,72.88 SHIFT13.14
  Top 0.813: RN13.2 173.72,88.54 175.12,89.94 175.12,97.04 170.22,101.94 170.22,109.24 168.82,110.64 162.12,110.64 160.7,109.22 IN13.4
  Bottom 0.305: RN13.2 167.12,82.84 v167.12,82.48
13-5  (via drill 0.6)
  Top 0.305: SHIFT13.3 168.32,72.88 168.82,72.38 168.82,69.98 167.42,68.58 v167.42,68.38
  Bottom 0.305: RN13.6 170.92,76.48 170.92,75.28 167.42,71.78 v167.42,68.38
  Bottom 0.813: RN13.6 173.96,78.38 175.02,79.44 175.02,93.24 165.82,102.44 165.12,102.44 163.22,104.34 163.22,105.92 IN13.5
13-6  (via drill 0.6)
  Top 0.305: v168.72,68.38 168.72,69.08 169.42,69.78 169.42,73.68 168.92,74.18 167.17,74.18 SHIFT13.4
  Bottom 0.305: RN13.7 168.72,71.74 v168.72,68.38
  Bottom 0.406: 167.02,102.84 165.82,104.04 165.22,104.04 164.52,104.74 164.52,107.2 IN13.6
  Bottom 0.813: RN13.7 173.22,75.84 176.22,78.84 176.22,93.74 167.02,102.84
13-7  (via drill 0.6)
  Top 0.305: v170.02,68.38 170.02,74.48 169.02,75.48 167.2,75.48 SHIFT13.5
  Bottom 0.305: RN13.8 170.02,70.5 v170.02,68.38
  Bottom 0.406: 165.78,105.58 IN13.7 165.78,105.08 166.22,104.64 166.62,104.64 168.22,103.24
  Bottom 0.813: RN13.8 177.42,77.9 177.42,94.24 168.22,103.24
13-8  (via drill 0.6)
  Top 0.305: v171.32,68.38 170.92,68.78 170.92,74.48 168.71,76.68 SHIFT13.6
  Bottom 0.305: RN13.9 171.32,69.26 v171.32,68.38 | IN13.8 167.05,107.21
  Bottom 0.406: 169.42,103.74 168.62,104.54 167.82,104.54 167.02,105.34 167.02,105.54 167.05,105.57 167.05,107.21
  Bottom 0.813: RN13.9 178.72,76.66 178.72,94.64 169.42,103.74
+3V3  (via drill 0.6)
  Top 0.61: IC1.P$57 IC1.P$56 IC1.P$55
  Top 0.813: v60.32,14.89 v64.97,14.89 | U$4.CHPD 77.45,16.45 75.89,14.89 71.05,14.89 70.24,14.08
  Top 1.27: v64.52,57.99 57.62,57.99 57.04,57.41 IC1.P$56
  Top 1.676: v66.32,27.78 71.62,22.48 71.62,15.58 70.17,14.13 | 70.17,14.13 70.04,14 U$2.VOUT | 70.24,14.08 70.19,14.13 70.17,14.13
  Bottom 0.61: 60.12,14.89 v60.32,14.89 | v64.97,14.89 67.09,14.89 R20-1K.2
  Bottom 0.813: R26-1K.2 58.64,13.21 v60.32,14.89 | U$4.VCC 81.12,15.38 78.52,15.38 77.45,16.45 U$4.CHPD
  Bottom 1: C7-100U.+ 61.74,44.58
  Bottom 1.27: C8-100U.+ 61.99,52.06 65.22,55.29 65.22,57.29 v64.52,57.99 | v64.97,14.89 69.01,14.89 70.04,13.86 U$2.VOUT
  Bottom 1.676: C8-100U.+ 61.39,51.92 C7-100U.+ 61.39,36.41 66.32,31.48 v66.32,27.78
A-1
  Top 0.61: SHIFTOUTA.15 20.46,135.48 25.02,138.04 23.02,140.64 26.12,143.74 26.12,158.24 29.22,161.34 29.22,165.67 OUTA.1
A-2
  Top 0.61: SHIFTOUTA.1 21.73,140.75 25.12,144.14 25.12,158.84 27.82,161.54 27.82,164.53 OUTA.2
A-3
  Top 0.406: 26.52,163.54 26.52,165.83 OUTA.3
  Top 0.61: SHIFTOUTA.2 20.46,140.88 24.12,144.54 24.12,159.34 26.52,161.74 26.52,163.54
A-4
  Top 0.61: SHIFTOUTA.3 19.19,141 23.12,144.94 23.12,159.84 25.32,162.04 25.32,164.49 OUTA.4
A-5